# EAGLE board Full (EAGLE 9.6.2), part 1 of 2
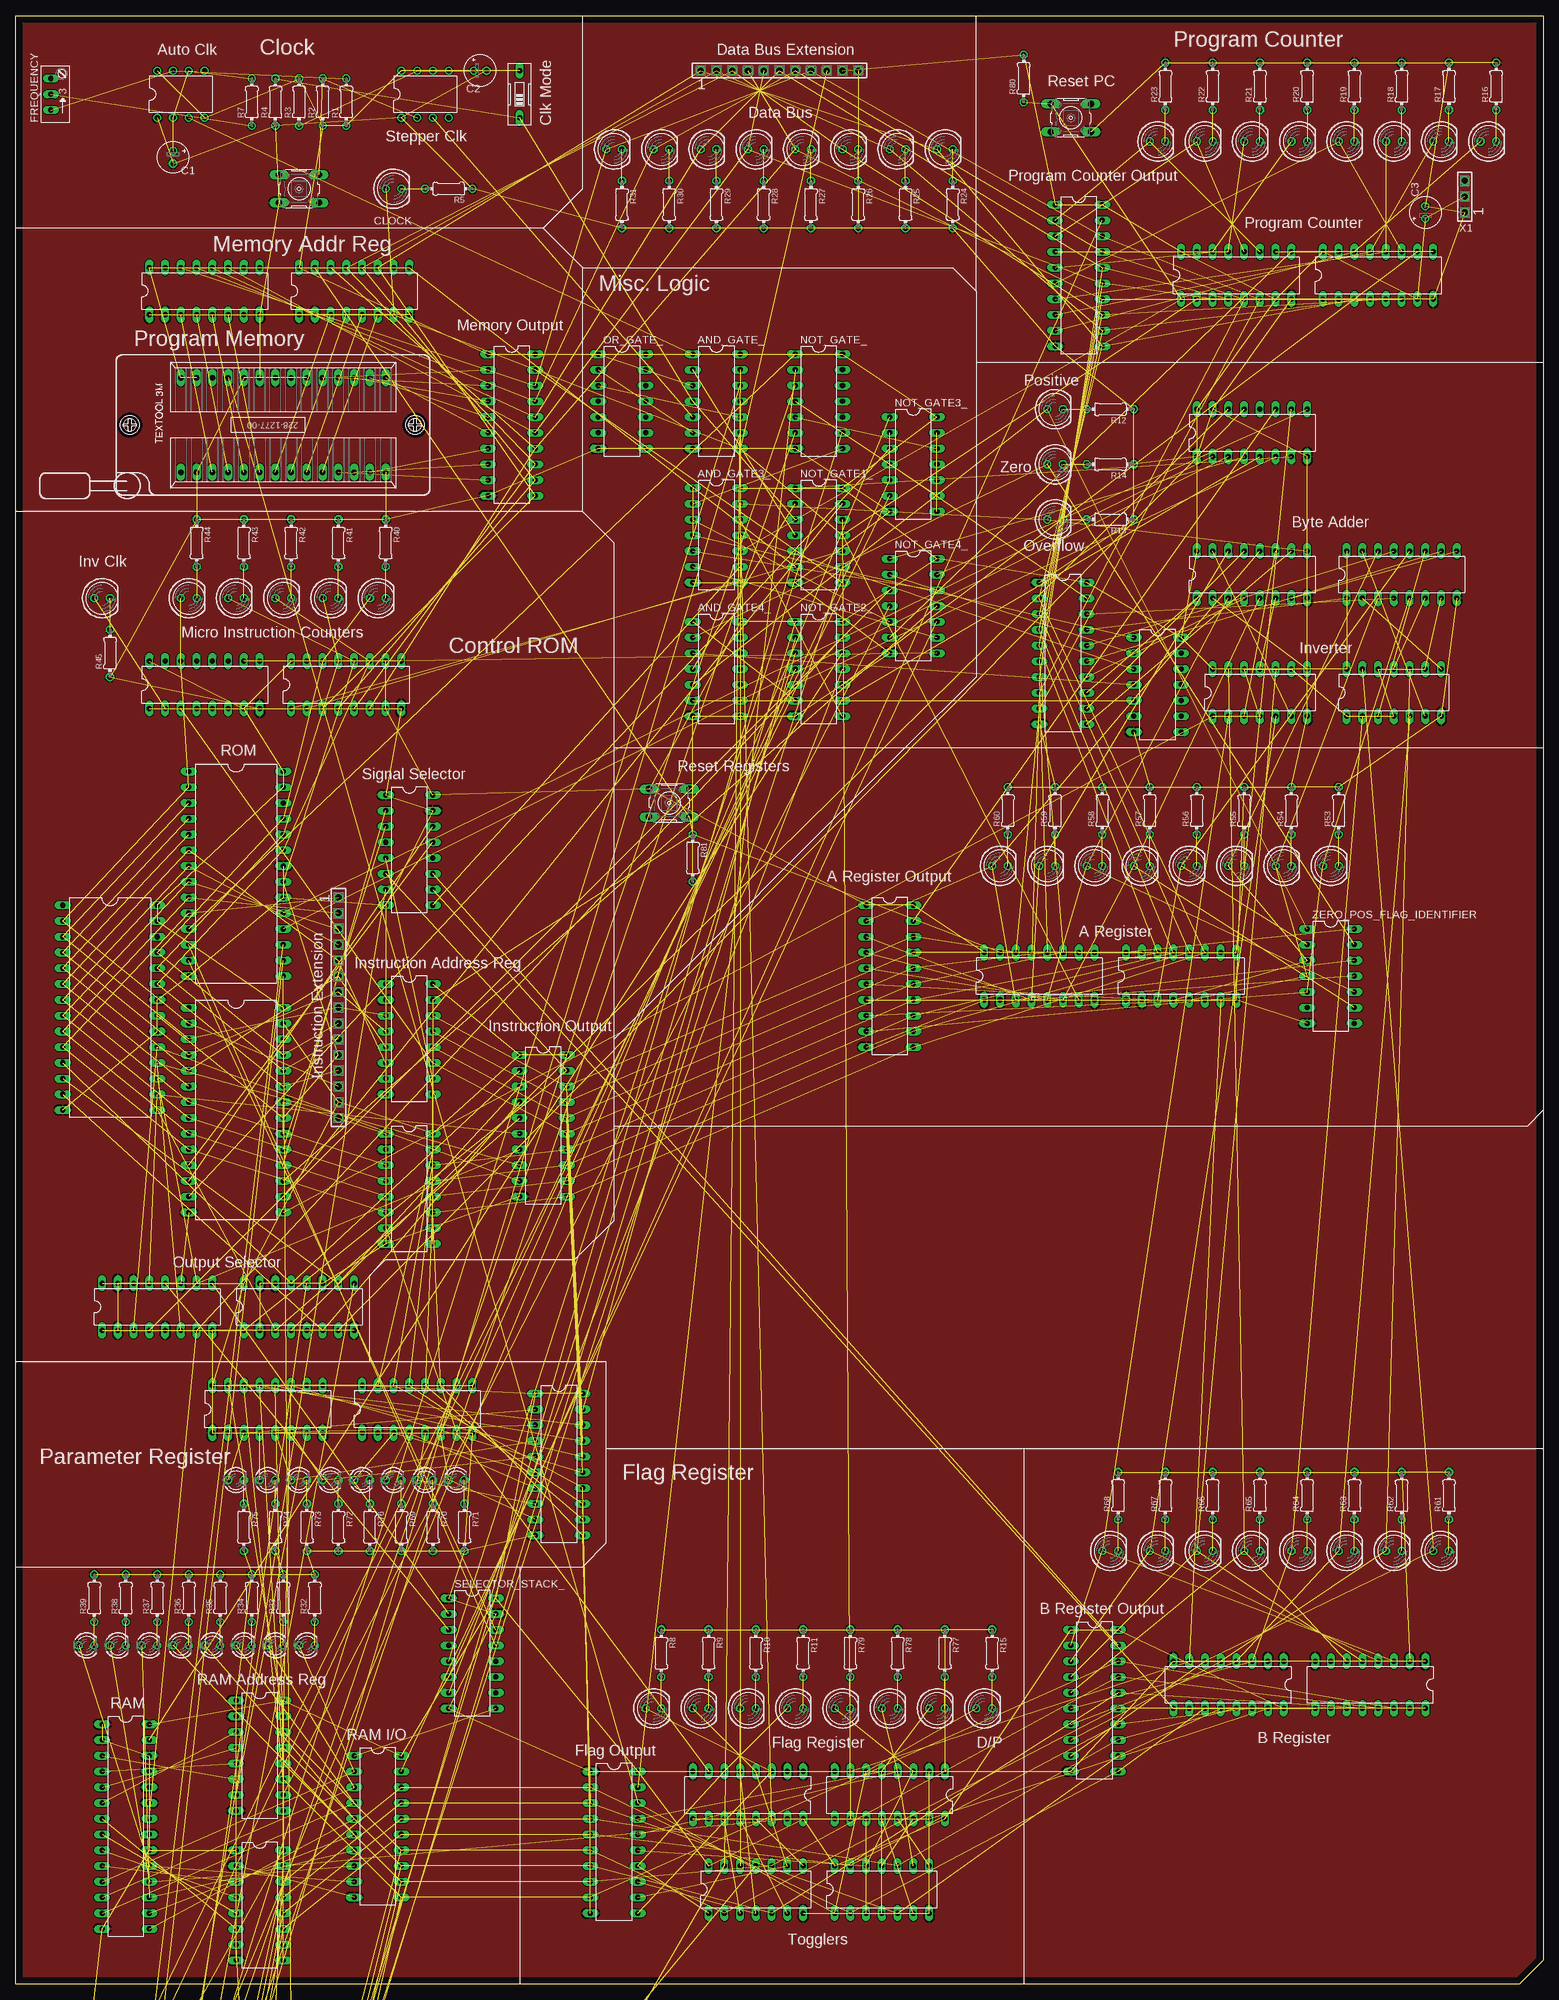
[diagram p0: board, top side]
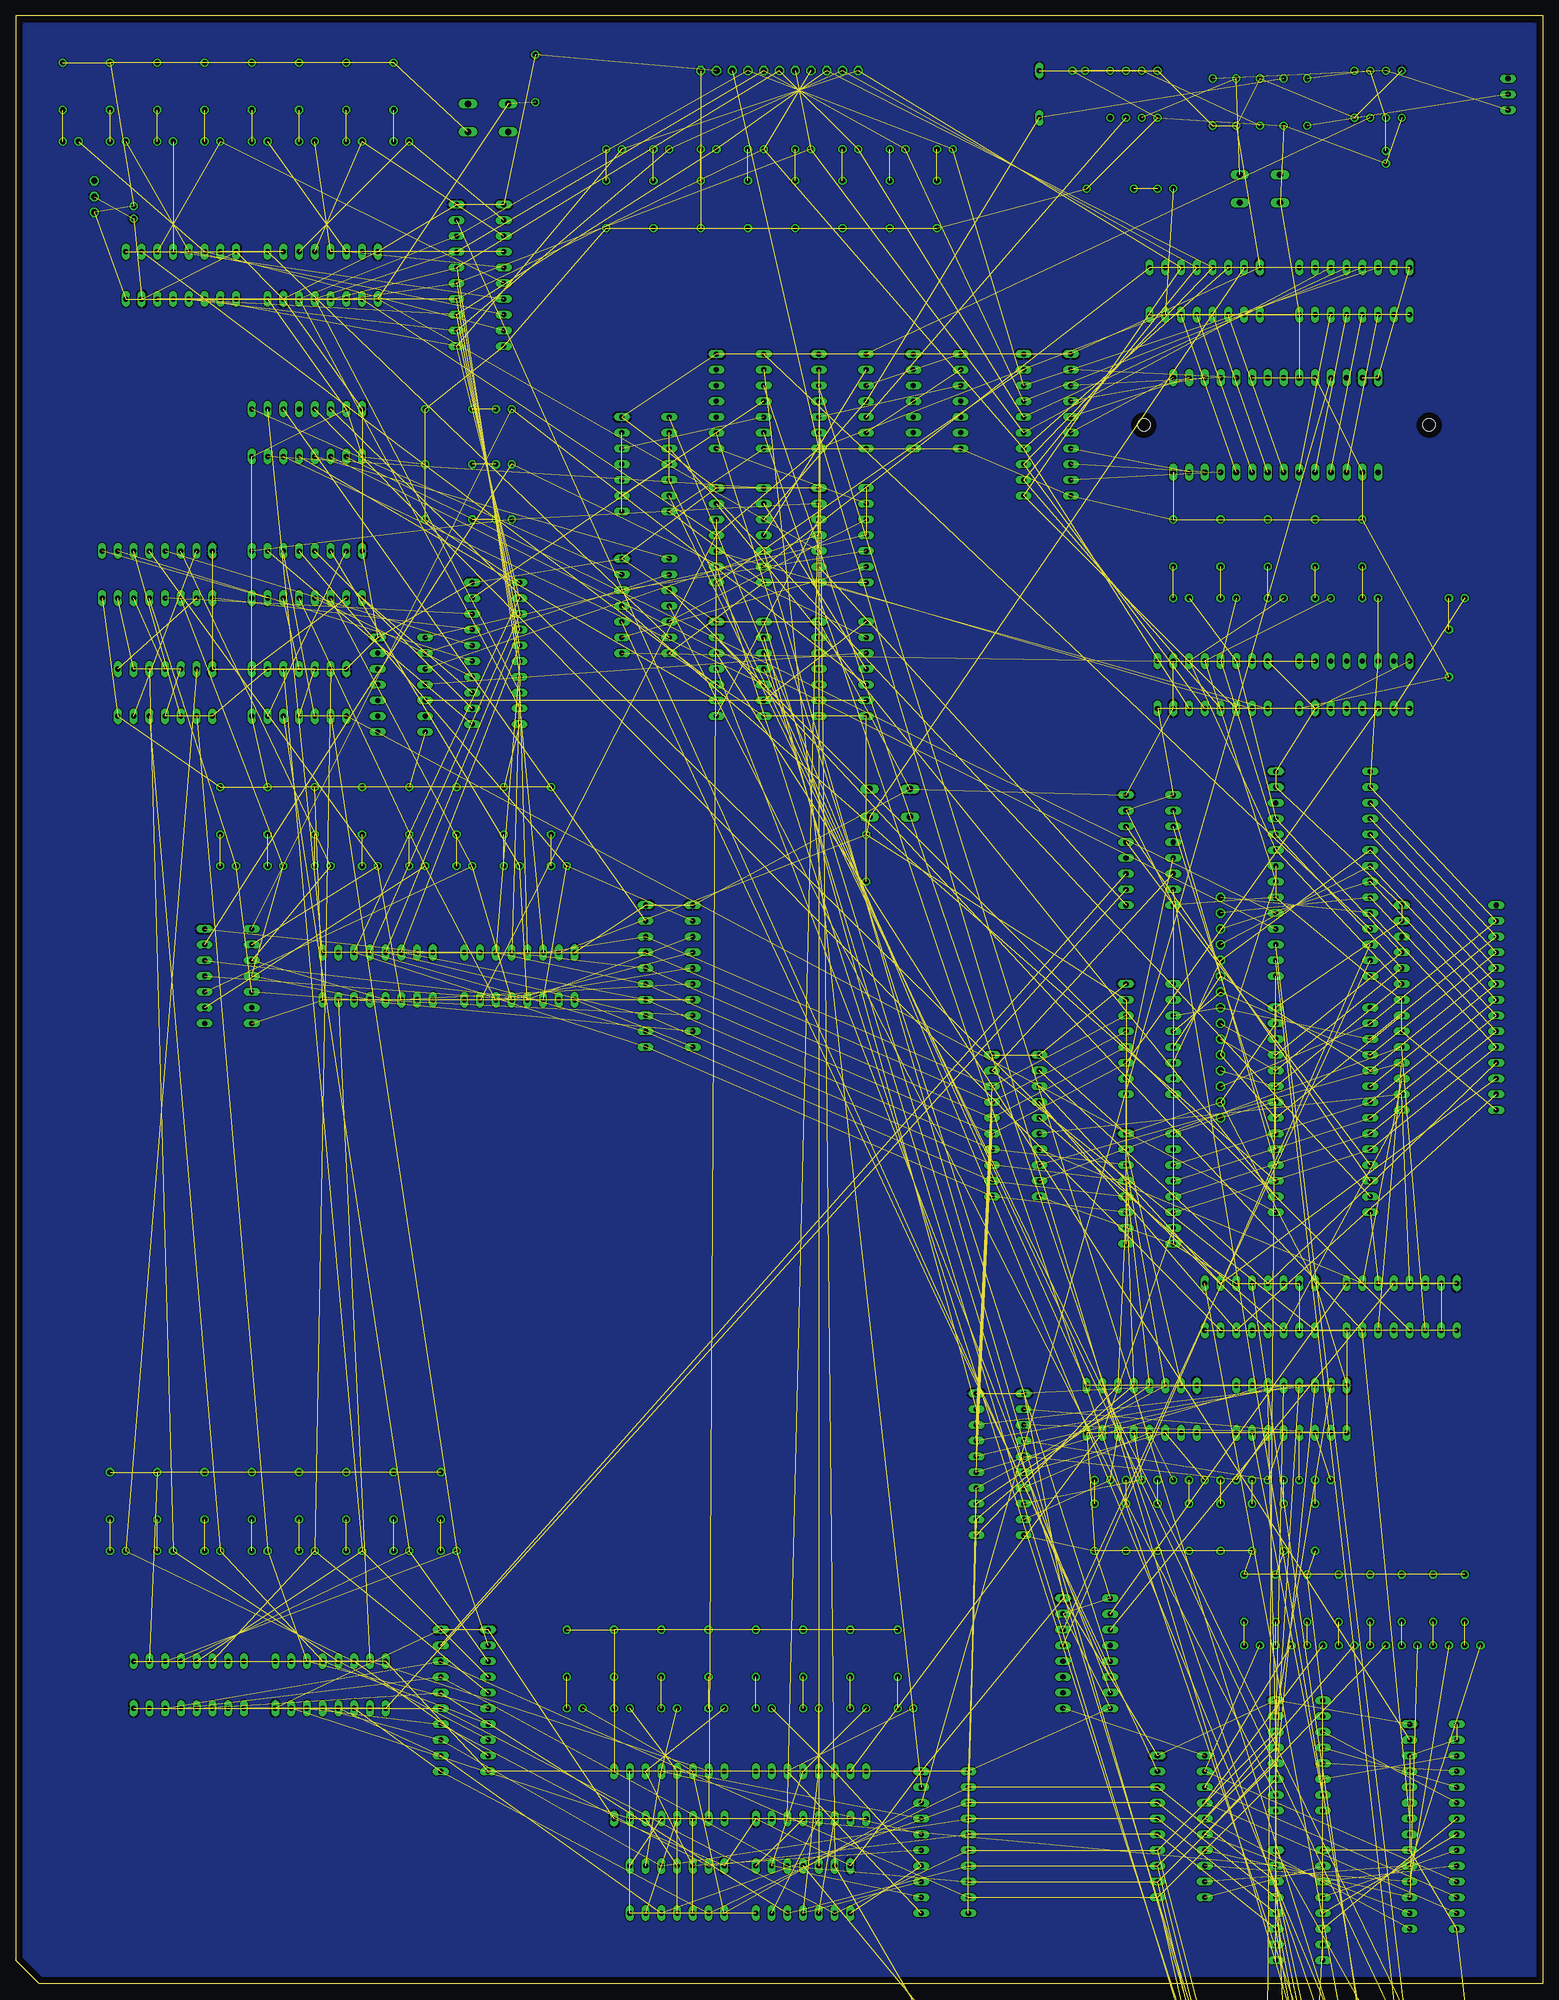
[diagram p1: board, bottom side, seen from below]

Size 246.38 x 317.5 mm. Coordinates in mm from the lower left corner, seen from the top.
Outline: 0,0 0,317.5 246.38,317.5 246.38,3.81 242.57,0 0,0
Copper layers (1*16): Top 0.035mm / dielectric 1.5mm / Bottom 0.035mm
Design rules "default": minimum track width 6mil, minimum drill 0.35mm, track to track 6mil, track to pad 6mil, pad to pad 6mil, via to via 6mil, smd to smd 6mil, copper to edge 40mil, drill to drill 6mil, minimum pad ring 10mil, minimum via ring 8mil, stop-mask expansion 4mil, vias tented up to drill 0mil, thermal gap 10mil

## Footprints (pad centres in the part's own frame; a part is rotated, then mirrored left to right if it is on the bottom)
DIL14 = drill 0.813 long: 1 -7.62,-3.81; 2 -5.08,-3.81; 3 -2.54,-3.81; 4 0,-3.81; 5 2.54,-3.81; 6 5.08,-3.81; 7 7.62,-3.81; 8 7.62,3.81; 9 5.08,3.81; 10 2.54,3.81; 11 0,3.81; 12 -2.54,3.81; 13 -5.08,3.81; 14 -7.62,3.81
DIL16 = drill 0.813 long: 1 -8.89,-3.81; 2 -6.35,-3.81; 3 -3.81,-3.81; 4 -1.27,-3.81; 5 1.27,-3.81; 6 3.81,-3.81; 7 6.35,-3.81; 8 8.89,-3.81; 9 8.89,3.81; 10 6.35,3.81; 11 3.81,3.81; 12 1.27,3.81; 13 -1.27,3.81; 14 -3.81,3.81; 15 -6.35,3.81; 16 -8.89,3.81
DIL08 = drill 0.813 pad 1.27: 1 -3.81,-3.81; 2 -1.27,-3.81; 3 1.27,-3.81; 4 3.81,-3.81; 5 3.81,3.81; 6 1.27,3.81; 7 -1.27,3.81; 8 -3.81,3.81
E2-5 = drill 0.813 pad 1.27: + -1.016,0 | drill 0.813 pad 1.27 octagon: - 1.016,0
EDG-01 = drill 0.813 long: 1 0,-3.81; 2 0,3.81
B3F-10XX = drill 1.016 long: 1 -3.251,2.261; 2 3.251,2.261; 3 -3.251,-2.261; 4 3.251,-2.261
LED5MM = drill 0.813 octagon: A -1.27,0; K 1.27,0
DO41Z10 = drill 1.118: A 5.08,0; C -5.08,0
SSW-111-02-G-S = drill 1 pad 1.5 octagon: 1 -12.7,0; 2 -10.16,0; 3 -7.62,0; 4 -5.08,0; 5 -2.54,0; 6 0,0; 7 2.54,0; 8 5.08,0; 9 7.62,0; 10 10.16,0; 11 12.7,0
RJ9W = drill 0.813 long: A 2.54,0.635; E -2.54,0.635; S 0,0.635
DIL28-6 = drill 0.813 long: 1 -16.51,-7.62; 2 -13.97,-7.62; 3 -11.43,-7.62; 4 -8.89,-7.62; 5 -6.35,-7.62; 6 -3.81,-7.62; 7 -1.27,-7.62; 8 1.27,-7.62; 9 3.81,-7.62; 10 6.35,-7.62; 11 8.89,-7.62; 12 11.43,-7.62; 13 13.97,-7.62; 14 16.51,-7.62; 15 16.51,7.62; 16 13.97,7.62; 17 11.43,7.62; 18 8.89,7.62; 19 6.35,7.62; 20 3.81,7.62; 21 1.27,7.62; 22 -1.27,7.62; 23 -3.81,7.62; 24 -6.35,7.62; 25 -8.89,7.62; 26 -11.43,7.62; 27 -13.97,7.62; 28 -16.51,7.62
SSW-115-02-G-S = drill 1 pad 1.5 octagon: 1 -17.78,0; 2 -15.24,0; 3 -12.7,0; 4 -10.16,0; 5 -7.62,0; 6 -5.08,0; 7 -2.54,0; 8 0,0; 9 2.54,0; 10 5.08,0; 11 7.62,0; 12 10.16,0; 13 12.7,0; 14 15.24,0; 15 17.78,0
SSW-104-02-G-S = drill 1 pad 1.5 octagon: 1 -3.81,0; 2 -1.27,0; 3 1.27,0; 4 3.81,0
228-1277-00-0602J = drill 0.9 long: 1 -16.51,-7.62; 2 -13.97,-7.62; 3 -11.43,-7.62; 4 -8.89,-7.62; 5 -6.35,-7.62; 6 -3.81,-7.62; 7 -1.27,-7.62; 8 1.27,-7.62; 9 3.81,-7.62; 10 6.35,-7.62; 11 8.89,-7.62; 12 11.43,-7.62; 13 13.97,-7.62; 14 16.51,-7.62; 15 16.51,7.62; 16 13.97,7.62; 17 11.43,7.62; 18 8.89,7.62; 19 6.35,7.62; 20 3.81,7.62; 21 1.27,7.62; 22 -1.27,7.62; 23 -3.81,7.62; 24 -6.35,7.62; 25 -8.89,7.62; 26 -11.43,7.62; 27 -13.97,7.62; 28 -16.51,7.62 | hole 2: 21.24,0; -24.74,0
7SEG-13 = drill 0.813 long: 1 -5.08,-7.62; 2 -2.54,-7.62; 3 0,-7.62; 4 2.54,-7.62; 5 5.08,-7.62; 6 5.08,7.62; 7 2.54,7.62; 8 0,7.62; 9 -2.54,7.62; 10 -5.08,7.62
DIL20 = drill 0.813 long: 1 -11.43,-3.81; 2 -8.89,-3.81; 3 -6.35,-3.81; 4 -3.81,-3.81; 5 -1.27,-3.81; 6 1.27,-3.81; 7 3.81,-3.81; 8 6.35,-3.81; 9 8.89,-3.81; 10 11.43,-3.81; 11 11.43,3.81; 12 8.89,3.81; 13 6.35,3.81; 14 3.81,3.81; 15 1.27,3.81; 16 -1.27,3.81; 17 -3.81,3.81; 18 -6.35,3.81; 19 -8.89,3.81; 20 -11.43,3.81
LED3MM = drill 0.813 octagon: A -1.27,0; K 1.27,0
0204/7 = drill 0.813 octagon: 1 -3.81,0; 2 3.81,0
DIL28-3 = drill 0.813 long: 1 -16.51,-3.81; 2 -13.97,-3.81; 3 -11.43,-3.81; 4 -8.89,-3.81; 5 -6.35,-3.81; 6 -3.81,-3.81; 7 -1.27,-3.81; 8 1.27,-3.81; 9 3.81,-3.81; 10 6.35,-3.81; 11 8.89,-3.81; 12 11.43,-3.81; 13 13.97,-3.81; 14 16.51,-3.81; 15 16.51,3.81; 16 13.97,3.81; 17 11.43,3.81; 18 8.89,3.81; 19 6.35,3.81; 20 3.81,3.81; 21 1.27,3.81; 22 -1.27,3.81; 23 -3.81,3.81; 24 -6.35,3.81; 25 -8.89,3.81; 26 -11.43,3.81; 27 -13.97,3.81; 28 -16.51,3.81
SSW-103-02-G-S = drill 1 pad 1.5 octagon: 1 -2.54,0; 2 0,0; 3 2.54,0

## Placement (x,y rotation side)
4_INP_OR_GATE  4072N  [DIL14]  184.15,209.55 270 top
ADDER_LOWER  74LS283N  [DIL16]  223.52,227.33 0 top
ADDER_UPPER  74LS283N  [DIL16]  199.39,227.33 0 top
ADDR_MEM_REG_LOWER  74LS173N  [DIL16]  54.61,273.05 0 top
ADDR_MEM_REG_UPPER  74LS173N  [DIL16]  30.48,273.05 0 top
AND_GATE3_  74LS08N  [DIL14]  113.03,233.68 270 top
AND_GATE4_  74LS08N  [DIL14]  113.03,212.09 270 top
AND_GATE_  74LS08N  [DIL14]  113.03,255.27 270 top
AUTO_CLOCK  NE555N  [DIL08]  26.67,304.8 0 top
C1  4.7uF  [E2-5]  25.4,294.64 270 top
C2  0.1uF  [E2-5]  74.93,308.61 0 top
C3  0.1uF  [E2-5]  227.33,285.75 90 top
C4  0.1uF  [E2-5]  2.54,-93.98 0 top  (outside the outline)
CLK_MODE  SWITCH  [EDG-01]  81.28,304.8 0 top
CLK_TRIGGER  SWITCH  [B3F-10XX]  45.72,289.56 0 top
CLOCK  Yellow  [LED5MM]  60.96,289.56 0 top
D1  1N4728  [DO41Z10]  5.08,-123.19 0 top  (outside the outline)
DATABUS_1  LED  [LED5MM]  149.86,295.91 0 top
DATABUS_2  LED  [LED5MM]  142.24,295.91 0 top
DATABUS_3  LED  [LED5MM]  134.62,295.91 0 top
DATABUS_4  LED  [LED5MM]  127,295.91 0 top
DATABUS_5  LED  [LED5MM]  119.38,295.91 0 top
DATABUS_6  LED  [LED5MM]  111.76,295.91 0 top
DATABUS_7  LED  [LED5MM]  104.14,295.91 0 top
DATABUS_8  LED  [LED5MM]  96.52,295.91 0 top
EXTENSION  SSW-111-02-G-S  [SSW-111-02-G-S]  123.19,308.61 0 top
FLAG_1  LED  [LED5MM]  156.21,44.45 0 top
FLAG_2  LED  [LED5MM]  148.59,44.45 0 top
FLAG_3  LED  [LED5MM]  140.97,44.45 0 top
FLAG_4  LED  [LED5MM]  133.35,44.45 0 top
FLAG_5  LED  [LED5MM]  125.73,44.45 0 top
FLAG_6  LED  [LED5MM]  118.11,44.45 0 top
FLAG_7  LED  [LED5MM]  110.49,44.45 0 top
FLAG_8  LED  [LED5MM]  102.87,44.45 0 top
FLAG_REG_LOWER  74LS173N  [DIL16]  118.11,30.48 180 top
FLAG_REG_UPPER  74LS173N  [DIL16]  140.97,30.48 180 top
FREQUENCY  100k  [RJ9W]  6.35,304.8 90 top
IC1  4161N  [DIL16]  -15.24,-303.53 0 top  (outside the outline)
INSTRUC_REGISTER_LOWER  74LS173N  [DIL16]  63.5,128.27 270 top
INSTRUC_REGISTER_UPPER  74LS173N  [DIL16]  63.5,152.4 270 top
INSTRUCTION_MEMORY_0  AT28C64B  [DIL28-6]  15.24,157.48 270 top
INSTRUCTION_MEMORY_1  AT28C64B  [DIL28-6]  35.56,140.97 270 top
INSTRUCTION_MEMORY_2  AT28C64B  [DIL28-6]  35.56,179.07 270 top
INSTRUCTIONS_EXTENSION  SSW-115-02-G-S  [SSW-115-02-G-S]  52.07,157.48 270 top
INVERTED_CLK_LED  LED  [LED5MM]  13.97,223.52 0 top
KEYBOARD  SSW-104-02-G-S  [SSW-104-02-G-S]  6.35,-69.85 0 top  (outside the outline)
KEYBOARD_ASCII_TABLE  AT28C64B  [DIL28-6]  19.05,-54.61 0 top  (outside the outline)
KEYBOARD_SHIFT_LOWER  74LS595N  [DIL16]  11.43,-39.37 0 top  (outside the outline)
KEYBOARD_SHIFT_UPPER  74LS595N  [DIL16]  11.43,-27.94 0 top  (outside the outline)
LED_A_REG_1  LED  [LED5MM]  212.09,180.34 0 top
LED_A_REG_2  LED  [LED5MM]  204.47,180.34 0 top
LED_A_REG_3  LED  [LED5MM]  196.85,180.34 0 top
LED_A_REG_4  LED  [LED5MM]  189.23,180.34 0 top
LED_A_REG_5  LED  [LED5MM]  181.61,180.34 0 top
LED_A_REG_6  LED  [LED5MM]  173.99,180.34 0 top
LED_A_REG_7  LED  [LED5MM]  166.37,180.34 0 top
LED_A_REG_8  LED  [LED5MM]  158.75,180.34 0 top
LED_B_REG_1  LED  [LED5MM]  229.87,69.85 0 top
LED_B_REG_2  LED  [LED5MM]  222.25,69.85 0 top
LED_B_REG_3  LED  [LED5MM]  214.63,69.85 0 top
LED_B_REG_4  LED  [LED5MM]  207.01,69.85 0 top
LED_B_REG_5  LED  [LED5MM]  199.39,69.85 0 top
LED_B_REG_6  LED  [LED5MM]  191.77,69.85 0 top
LED_B_REG_7  LED  [LED5MM]  184.15,69.85 0 top
LED_B_REG_8  LED  [LED5MM]  176.53,69.85 0 top
MEMORY  228-1277-00-0602J  [228-1277-00-0602J]  43.18,251.46 0 top
MICRO_COUNTER_LOWER  74LS161  [DIL16]  53.34,209.55 0 top
MICRO_COUNTER_UPPER  74LS161  [DIL16]  30.48,209.55 0 top
NOR_GATE_  74LS02N  [DIL14]  10.16,-102.87 0 top  (outside the outline)
NOT_GATE1_  74LS04N  [DIL14]  129.54,233.68 270 top
NOT_GATE2_  74LS04N  [DIL14]  129.54,212.09 270 top
NOT_GATE3_  74LS04N  [DIL14]  144.78,245.11 270 top
NOT_GATE4_  74LS04N  [DIL14]  144.78,222.25 270 top
NOT_GATE_  74LS04N  [DIL14]  129.54,255.27 270 top
OR_GATE_  74LS32N  [DIL14]  97.79,255.27 270 top
OUT_REG_LOWER  74LS173N  [DIL16]  39.37,-179.07 0 top  (outside the outline)
OUT_REG_UPPER  74LS173N  [DIL16]  11.43,-207.01 0 top  (outside the outline)
OUT_ROM_LOWER  AT28C64B  [DIL28-6]  -7.62,-276.86 0 top  (outside the outline)
OUT_ROM_UPPER  AT28C64B  [DIL28-6]  19.05,-240.03 0 top  (outside the outline)
OUT_SEGMENT_LOWER  LED  [7SEG-13]  -21.59,-237.49 0 top  (outside the outline)
OUT_SEGMENT_UPPER  LED  [7SEG-13]  -7.62,-237.49 0 top  (outside the outline)
OUTPUT_BUFFER_ALU  74LS245N  [DIL20]  168.91,214.63 270 top
OUTPUT_BUFFER_CALC_REG  74LS245N  [DIL20]  173.99,45.72 270 top
OUTPUT_BUFFER_FLAGS  74HC245N  [DIL20]  96.52,22.86 270 top
OUTPUT_BUFFER_INSTRUCTION  74LS245N  [DIL20]  85.09,138.43 270 top
OUTPUT_BUFFER_KEYBOARD  74LS245N  [DIL20]  13.97,-154.94 0 top  (outside the outline)
OUTPUT_BUFFER_MEMORY  74LS245N  [DIL20]  80.01,251.46 270 top
OUTPUT_BUFFER_PARAM_REG  74LS245N  [DIL20]  87.63,83.82 270 top
OUTPUT_BUFFER_PC  74LS245N  [DIL20]  171.45,275.59 270 top
OUTPUT_BUFFER_RAM  74HC245N  [DIL20]  58.42,25.4 270 top
OUTPUT_BUFFER_REG_A  74LS245N  [DIL20]  140.97,162.56 270 top
OVERFLOW_FLAG  LED  [LED5MM]  167.64,236.22 0 top
PARAM_LED_1  [LED3MM]  71.12,81.28 0 top
PARAM_LED_2  [LED3MM]  66.04,81.28 0 top
PARAM_LED_3  [LED3MM]  60.96,81.28 0 top
PARAM_LED_4  [LED3MM]  55.88,81.28 0 top
PARAM_LED_5  [LED3MM]  50.8,81.28 0 top
PARAM_LED_6  [LED3MM]  45.72,81.28 0 top
PARAM_LED_7  [LED3MM]  40.64,81.28 0 top
PARAM_LED_8  [LED3MM]  35.56,81.28 0 top
PC_1  [LED5MM]  237.49,297.18 0 top
PC_2  [LED5MM]  229.87,297.18 0 top
PC_3  [LED5MM]  222.25,297.18 0 top
PC_4  [LED5MM]  214.63,297.18 0 top
PC_5  [LED5MM]  207.01,297.18 0 top
PC_6  [LED5MM]  199.39,297.18 0 top
PC_7  [LED5MM]  191.77,297.18 0 top
PC_8  [LED5MM]  184.15,297.18 0 top
POSITIVE_FLAG  LED  [LED5MM]  167.64,254 0 top
PROGRAM_COUNTER_LOWER  74LS161  [DIL16]  219.71,275.59 0 top
PROGRAM_COUNTER_UPPER  74LS161  [DIL16]  196.85,275.59 0 top
R1  1k  [0204/7]  53.34,303.53 90 top
R2  1k  [0204/7]  49.53,303.53 90 top
R3  10k  [0204/7]  45.72,303.53 90 top
R4  220  [0204/7]  41.91,303.53 90 top
R5  ~220  [0204/7]  69.85,289.56 180 top
R6  ~220  [0204/7]  3.81,-88.9 0 top  (outside the outline)
R7  220  [0204/7]  38.1,303.53 90 top
R8  ~220  [0204/7]  104.14,53.34 270 top
R9  ~220  [0204/7]  111.76,53.34 270 top
R10  ~220  [0204/7]  119.38,53.34 270 top
R11  ~220  [0204/7]  127,53.34 270 top
R12  ~220  [0204/7]  176.53,254 180 top
R13  ~220  [0204/7]  176.53,236.22 180 top
R14  ~220  [0204/7]  176.53,245.11 180 top
R15  ~220  [0204/7]  157.48,53.34 270 top
R16  ~220  [0204/7]  238.76,306.07 90 top
R17  ~220  [0204/7]  231.14,306.07 90 top
R18  ~220  [0204/7]  223.52,306.07 90 top
R19  ~220  [0204/7]  215.9,306.07 90 top
R20  ~220  [0204/7]  208.28,306.07 90 top
R21  ~220  [0204/7]  200.66,306.07 90 top
R22  ~220  [0204/7]  193.04,306.07 90 top
R23  ~220  [0204/7]  185.42,306.07 90 top
R24  ~220  [0204/7]  151.13,287.02 270 top
R25  ~220  [0204/7]  143.51,287.02 270 top
R26  ~220  [0204/7]  135.89,287.02 270 top
R27  ~220  [0204/7]  128.27,287.02 270 top
R28  ~220  [0204/7]  120.65,287.02 270 top
R29  ~220  [0204/7]  113.03,287.02 270 top
R30  ~220  [0204/7]  105.41,287.02 270 top
R31  ~220  [0204/7]  97.79,287.02 270 top
R32  ~220  [0204/7]  48.26,62.23 90 top
R33  ~220  [0204/7]  43.18,62.23 90 top
R34  ~220  [0204/7]  38.1,62.23 90 top
R35  ~220  [0204/7]  33.02,62.23 90 top
R36  ~220  [0204/7]  27.94,62.23 90 top
R37  ~220  [0204/7]  22.86,62.23 90 top
R38  ~220  [0204/7]  17.78,62.23 90 top
R39  ~220  [0204/7]  12.7,62.23 90 top
R40  ~220  [0204/7]  59.69,232.41 270 top
R41  ~220  [0204/7]  52.07,232.41 270 top
R42  ~220  [0204/7]  44.45,232.41 270 top
R43  ~220  [0204/7]  36.83,232.41 270 top
R44  ~220  [0204/7]  29.21,232.41 270 top
R45  ~220  [0204/7]  15.24,214.63 90 top
R53  ~220  [0204/7]  213.36,189.23 90 top
R54  ~220  [0204/7]  205.74,189.23 90 top
R55  ~220  [0204/7]  198.12,189.23 90 top
R56  ~220  [0204/7]  190.5,189.23 90 top
R57  ~220  [0204/7]  182.88,189.23 90 top
R58  ~220  [0204/7]  175.26,189.23 90 top
R59  ~220  [0204/7]  167.64,189.23 90 top
R60  ~220  [0204/7]  160.02,189.23 90 top
R61  ~220  [0204/7]  231.14,78.74 90 top
R62  ~220  [0204/7]  223.52,78.74 90 top
R63  ~220  [0204/7]  215.9,78.74 90 top
R64  ~220  [0204/7]  208.28,78.74 90 top
R65  ~220  [0204/7]  200.66,78.74 90 top
R66  ~220  [0204/7]  193.04,78.74 90 top
R67  ~220  [0204/7]  185.42,78.74 90 top
R68  ~220  [0204/7]  177.8,78.74 90 top
R69  ~220  [0204/7]  62.23,73.66 270 top
R70  ~220  [0204/7]  67.31,73.66 270 top
R71  ~220  [0204/7]  72.39,73.66 270 top
R72  ~220  [0204/7]  52.07,73.66 270 top
R73  ~220  [0204/7]  46.99,73.66 270 top
R74  ~220  [0204/7]  41.91,73.66 270 top
R75  ~220  [0204/7]  36.83,73.66 270 top
R76  ~220  [0204/7]  57.15,73.66 270 top
R77  ~220  [0204/7]  149.86,53.34 270 top
R78  ~220  [0204/7]  142.24,53.34 270 top
R79  ~220  [0204/7]  134.62,53.34 270 top
R80  ~220  [0204/7]  162.56,307.34 90 top
R81  ~220  [0204/7]  109.22,181.61 270 top
RAM  71256SA15TPG  [DIL28-3]  17.78,25.4 270 top
RAM1  71256SA15TPG  [DIL28-3]  -7.62,-292.1 0 top  (outside the outline)
RAM_ADDR_LOWER  74LS173N  [DIL16]  39.37,12.7 270 top
RAM_ADDR_UPPER  74LS173N  [DIL16]  39.37,36.83 270 top
RAM_LED_1  [LED3MM]  46.99,54.61 0 top
RAM_LED_2  [LED3MM]  41.91,54.61 0 top
RAM_LED_3  [LED3MM]  36.83,54.61 0 top
RAM_LED_4  [LED3MM]  31.75,54.61 0 top
RAM_LED_5  [LED3MM]  26.67,54.61 0 top
RAM_LED_6  [LED3MM]  21.59,54.61 0 top
RAM_LED_7  [LED3MM]  16.51,54.61 0 top
RAM_LED_8  [LED3MM]  11.43,54.61 0 top
REG_A_LOWER  74LS173N  [DIL16]  187.96,162.56 0 top
REG_A_UPPER  74LS173N  [DIL16]  165.1,162.56 0 top
REG_CALC_LOWER  74LS173N  [DIL16]  195.58,48.26 180 top
REG_CALC_UPPER  74LS173N  [DIL16]  218.44,48.26 180 top
REG_PARAM_LOWER  74LS173N  [DIL16]  64.77,92.71 0 top
REG_PARAM_UPPER  74LS173N  [DIL16]  40.64,92.71 0 top
RESET_PC  NORM-OFF  [B3F-10XX]  170.18,300.99 0 top
RESET_REGS  NORM-OFF  [B3F-10XX]  105.41,190.5 0 top
SELECTOR_BRANCH_  74HC139N  [DIL16]  199.39,250.19 0 top
SELECTOR_INSRUCTION_LOWER  74LS157N  [DIL16]  45.72,109.22 0 top
SELECTOR_INSRUCTION_UPPER  74LS157N  [DIL16]  22.86,109.22 0 top
SELECTOR_LOGIC_  74HC139N  [DIL16]  63.5,182.88 270 top
SELECTOR_PARAM_  74LS139N  [DIL16]  11.43,-143.51 0 top  (outside the outline)
SELECTOR_STACK_  74LS139N  [DIL16]  73.66,53.34 270 top
STEPPER_CLOCK  NE555N  [DIL08]  66.04,304.8 0 top
SUBTRACT_INVRTR_LOWER_  74LS86N  [DIL14]  222.25,208.28 0 top
SUBTRACT_INVRTR_UPPER_  74LS86N  [DIL14]  200.66,208.28 0 top
USTEP_1  LED  [LED5MM]  58.42,223.52 0 top
USTEP_2  LED  [LED5MM]  50.8,223.52 0 top
USTEP_3  LED  [LED5MM]  43.18,223.52 0 top
USTEP_4  LED  [LED5MM]  35.56,223.52 0 top
USTEP_5  LED  [LED5MM]  27.94,223.52 0 top
X1  SSW-103-02-G-S  [SSW-103-02-G-S]  233.68,288.29 90 top
XOR_GATE_1  74LS86N  [DIL14]  139.7,15.24 0 top
XOR_GATE_2  74LS86N  [DIL14]  119.38,15.24 0 top
ZERO_FLAG  220  [LED5MM]  167.64,245.11 0 top
ZERO_POS_FLAG_IDENTIFIER  744078N  [DIL14]  212.09,162.56 270 top

## Library data of the parts
4_INP_OR_GATE IC1 = 40xx
ADDER_LOWER ADDER_UPPER ADDR_MEM_REG_LOWER ADDR_MEM_REG_UPPER AND_GATE3_ AND_GATE4_ AND_GATE_ FLAG_REG_LOWER FLAG_REG_UPPER INSTRUC_REGISTER_LOWER INSTRUC_REGISTER_UPPER KEYBOARD_SHIFT_LOWER KEYBOARD_SHIFT_UPPER NOR_GATE_ NOT_GATE1_ NOT_GATE2_ NOT_GATE3_ NOT_GATE_ OR_GATE_ OUT_REG_LOWER OUT_REG_UPPER OUTPUT_BUFFER_ALU OUTPUT_BUFFER_CALC_REG OUTPUT_BUFFER_FLAGS OUTPUT_BUFFER_KEYBOARD OUTPUT_BUFFER_MEMORY OUTPUT_BUFFER_PARAM_REG OUTPUT_BUFFER_PC OUTPUT_BUFFER_RAM OUTPUT_BUFFER_REG_A RAM_ADDR_LOWER RAM_ADDR_UPPER REG_A_LOWER REG_A_UPPER REG_CALC_LOWER REG_CALC_UPPER REG_PARAM_LOWER REG_PARAM_UPPER SELECTOR_BRANCH_ SELECTOR_INSRUCTION_LOWER SELECTOR_INSRUCTION_UPPER SELECTOR_LOGIC_ SELECTOR_PARAM_ SELECTOR_STACK_ SUBTRACT_INVRTR_LOWER_ SUBTRACT_INVRTR_UPPER_ XOR_GATE_1 XOR_GATE_2 = 74xx-eu
AUTO_CLOCK STEPPER_CLOCK = linear
C1-C4 = rcl; SPICEPREFIX: C
CLK_MODE OUT_SEGMENT_LOWER OUT_SEGMENT_UPPER = special
CLK_TRIGGER RESET_PC RESET_REGS = switch-omron; MPN: B3F-1000; OC_FARNELL: 176432; OC_NEWARK: 36M3542
CLOCK DATABUS_1-DATABUS_8 FLAG_1-FLAG_8 INVERTED_CLK_LED LED_A_REG_1-LED_A_REG_8 LED_B_REG_1-LED_B_REG_8 OVERFLOW_FLAG PARAM_LED_1-PARAM_LED_8 PC_1-PC_8 POSITIVE_FLAG RAM_LED_1-RAM_LED_8 USTEP_1-USTEP_5 ZERO_FLAG = led
D1 = diode
EXTENSION = con-samtec; MF: Samtec Inc.; MPN: SSW-111-02-G-S; OC_FARNELL: unknown; OC_NEWARK: 11P9498
FREQUENCY = pot
INSTRUCTION_MEMORY_0 INSTRUCTION_MEMORY_1 INSTRUCTION_MEMORY_2 KEYBOARD_ASCII_TABLE MICRO_COUNTER_LOWER MICRO_COUNTER_UPPER OUT_ROM_LOWER OUT_ROM_UPPER PROGRAM_COUNTER_LOWER PROGRAM_COUNTER_UPPER RAM RAM1 = ic-package
INSTRUCTIONS_EXTENSION = con-samtec; MF: Samtec Inc.; MPN: SSW-115-02-G-S; OC_FARNELL: unknown; OC_NEWARK: 11P9564
KEYBOARD = con-samtec; MF: Samtec Inc.; MPN: SSW-104-02-G-S; OC_FARNELL: unknown; OC_NEWARK: 11P9384
MEMORY = con-3m; MF: 3M; MPN: 228-1277-00-0602J; OC_FARNELL: 9897356; OC_NEWARK: 85K7825
NOT_GATE4_ = 74xx-eu; SPICEPREFIX: B
OUTPUT_BUFFER_INSTRUCTION = 74xx-us
R1-R45 R53-R81 = rcl; SPICEPREFIX: R
X1 = con-samtec; MF: Samtec Inc.; MPN: SSW-103-02-G-S; OC_FARNELL: unknown; OC_NEWARK: 11P9367
ZERO_POS_FLAG_IDENTIFIER = 74ttl-din

## Nets
1_PLACE1 [Databus]: ADDR_MEM_REG_LOWER.11 DATABUS_1.A EXTENSION.1 INSTRUC_REGISTER_LOWER.11 MICRO_COUNTER_LOWER.3 OUT_REG_LOWER.11 OUTPUT_BUFFER_ALU.2 OUTPUT_BUFFER_CALC_REG.11 OUTPUT_BUFFER_FLAGS.2 OUTPUT_BUFFER_INSTRUCTION.11 OUTPUT_BUFFER_KEYBOARD.2 OUTPUT_BUFFER_MEMORY.11 OUTPUT_BUFFER_PARAM_REG.11 OUTPUT_BUFFER_PC.11 OUTPUT_BUFFER_RAM.18 OUTPUT_BUFFER_REG_A.11 PROGRAM_COUNTER_LOWER.3 RAM_ADDR_LOWER.14 REG_A_LOWER.11 REG_CALC_LOWER.11 REG_PARAM_LOWER.11 XOR_GATE_1.2
2_PLACE [Databus]: ADDR_MEM_REG_LOWER.12 DATABUS_2.A EXTENSION.2 INSTRUC_REGISTER_LOWER.12 MICRO_COUNTER_LOWER.4 OUT_REG_LOWER.12 OUTPUT_BUFFER_ALU.3 OUTPUT_BUFFER_CALC_REG.12 OUTPUT_BUFFER_FLAGS.3 OUTPUT_BUFFER_INSTRUCTION.12 OUTPUT_BUFFER_KEYBOARD.3 OUTPUT_BUFFER_MEMORY.12 OUTPUT_BUFFER_PARAM_REG.12 OUTPUT_BUFFER_PC.12 OUTPUT_BUFFER_RAM.17 OUTPUT_BUFFER_REG_A.12 PROGRAM_COUNTER_LOWER.4 RAM_ADDR_LOWER.13 REG_A_LOWER.12 REG_CALC_LOWER.12 REG_PARAM_LOWER.12 XOR_GATE_1.5
4_PLACE [Databus]: ADDR_MEM_REG_LOWER.13 DATABUS_3.A EXTENSION.3 INSTRUC_REGISTER_LOWER.13 MICRO_COUNTER_LOWER.5 OUT_REG_LOWER.13 OUTPUT_BUFFER_ALU.4 OUTPUT_BUFFER_CALC_REG.13 OUTPUT_BUFFER_FLAGS.4 OUTPUT_BUFFER_INSTRUCTION.13 OUTPUT_BUFFER_KEYBOARD.4 OUTPUT_BUFFER_MEMORY.13 OUTPUT_BUFFER_PARAM_REG.13 OUTPUT_BUFFER_PC.13 OUTPUT_BUFFER_RAM.16 OUTPUT_BUFFER_REG_A.13 PROGRAM_COUNTER_LOWER.5 RAM_ADDR_LOWER.12 REG_A_LOWER.13 REG_CALC_LOWER.13 REG_PARAM_LOWER.13 XOR_GATE_1.10
8_PLACE [Databus]: ADDR_MEM_REG_LOWER.14 DATABUS_4.A EXTENSION.4 INSTRUC_REGISTER_LOWER.14 MICRO_COUNTER_LOWER.6 OUT_REG_LOWER.14 OUTPUT_BUFFER_ALU.5 OUTPUT_BUFFER_CALC_REG.14 OUTPUT_BUFFER_FLAGS.5 OUTPUT_BUFFER_INSTRUCTION.14 OUTPUT_BUFFER_KEYBOARD.5 OUTPUT_BUFFER_MEMORY.14 OUTPUT_BUFFER_PARAM_REG.14 OUTPUT_BUFFER_PC.14 OUTPUT_BUFFER_RAM.15 OUTPUT_BUFFER_REG_A.14 PROGRAM_COUNTER_LOWER.6 RAM_ADDR_LOWER.11 REG_A_LOWER.14 REG_CALC_LOWER.14 REG_PARAM_LOWER.14 XOR_GATE_1.13
16_PLACE [Databus]: ADDR_MEM_REG_UPPER.11 DATABUS_5.A EXTENSION.5 INSTRUC_REGISTER_UPPER.11 MICRO_COUNTER_UPPER.3 OUT_REG_UPPER.11 OUTPUT_BUFFER_ALU.6 OUTPUT_BUFFER_CALC_REG.15 OUTPUT_BUFFER_FLAGS.6 OUTPUT_BUFFER_INSTRUCTION.15 OUTPUT_BUFFER_KEYBOARD.6 OUTPUT_BUFFER_MEMORY.15 OUTPUT_BUFFER_PARAM_REG.15 OUTPUT_BUFFER_PC.15 OUTPUT_BUFFER_RAM.14 OUTPUT_BUFFER_REG_A.15 PROGRAM_COUNTER_UPPER.3 RAM_ADDR_UPPER.14 REG_A_UPPER.11 REG_CALC_UPPER.11 REG_PARAM_UPPER.11 XOR_GATE_2.2
32_PLACE [Databus]: ADDR_MEM_REG_UPPER.12 DATABUS_6.A EXTENSION.6 INSTRUC_REGISTER_UPPER.12 OUT_REG_UPPER.12 OUTPUT_BUFFER_ALU.7 OUTPUT_BUFFER_CALC_REG.16 OUTPUT_BUFFER_FLAGS.7 OUTPUT_BUFFER_INSTRUCTION.16 OUTPUT_BUFFER_KEYBOARD.7 OUTPUT_BUFFER_MEMORY.16 OUTPUT_BUFFER_PARAM_REG.16 OUTPUT_BUFFER_PC.16 OUTPUT_BUFFER_RAM.13 OUTPUT_BUFFER_REG_A.16 PROGRAM_COUNTER_UPPER.4 RAM_ADDR_UPPER.13 REG_A_UPPER.12 REG_CALC_UPPER.12 REG_PARAM_UPPER.12 XOR_GATE_2.5
64_PLACE [Databus]: ADDR_MEM_REG_UPPER.13 DATABUS_7.A EXTENSION.7 INSTRUC_REGISTER_UPPER.13 OUT_REG_UPPER.13 OUTPUT_BUFFER_ALU.8 OUTPUT_BUFFER_CALC_REG.17 OUTPUT_BUFFER_FLAGS.8 OUTPUT_BUFFER_INSTRUCTION.17 OUTPUT_BUFFER_KEYBOARD.8 OUTPUT_BUFFER_MEMORY.17 OUTPUT_BUFFER_PARAM_REG.17 OUTPUT_BUFFER_PC.17 OUTPUT_BUFFER_RAM.12 OUTPUT_BUFFER_REG_A.17 PROGRAM_COUNTER_UPPER.5 RAM_ADDR_UPPER.12 REG_A_UPPER.13 REG_CALC_UPPER.13 REG_PARAM_UPPER.13 XOR_GATE_2.10
128_PLACE [Databus]: ADDR_MEM_REG_UPPER.14 DATABUS_8.A EXTENSION.8 INSTRUC_REGISTER_UPPER.14 OUT_REG_UPPER.14 OUTPUT_BUFFER_ALU.9 OUTPUT_BUFFER_CALC_REG.18 OUTPUT_BUFFER_FLAGS.9 OUTPUT_BUFFER_INSTRUCTION.18 OUTPUT_BUFFER_KEYBOARD.9 OUTPUT_BUFFER_MEMORY.18 OUTPUT_BUFFER_PARAM_REG.18 OUTPUT_BUFFER_PC.18 OUTPUT_BUFFER_RAM.11 OUTPUT_BUFFER_REG_A.18 PROGRAM_COUNTER_UPPER.6 RAM_ADDR_UPPER.11 REG_A_UPPER.14 REG_CALC_UPPER.14 REG_PARAM_UPPER.14
>0_FLAG: AND_GATE4_.5 POSITIVE_FLAG.A ZERO_POS_FLAG_IDENTIFIER.1
CALC_IN: REG_CALC_LOWER.9 REG_CALC_LOWER.10 REG_CALC_UPPER.9 REG_CALC_UPPER.10 SELECTOR_LOGIC_.10
CALC_OUT: OUTPUT_BUFFER_CALC_REG.19 SELECTOR_LOGIC_.11
CLOCK: ADDR_MEM_REG_LOWER.7 ADDR_MEM_REG_UPPER.7 AND_GATE_.8 CLOCK.A EXTENSION.9 FLAG_REG_LOWER.7 FLAG_REG_UPPER.7 INSTRUC_REGISTER_LOWER.7 INSTRUC_REGISTER_UPPER.7 NOT_GATE1_.11 OUT_REG_LOWER.7 OUT_REG_UPPER.7 PROGRAM_COUNTER_LOWER.2 PROGRAM_COUNTER_UPPER.2 RAM_ADDR_LOWER.7 RAM_ADDR_UPPER.7 REG_A_LOWER.7 REG_A_UPPER.7 REG_CALC_LOWER.7 REG_CALC_UPPER.7 REG_PARAM_LOWER.7 REG_PARAM_UPPER.7
CLR_REG: ADDR_MEM_REG_LOWER.15 ADDR_MEM_REG_UPPER.15 FLAG_REG_LOWER.15 FLAG_REG_UPPER.15 INSTRUC_REGISTER_LOWER.15 INSTRUC_REGISTER_UPPER.15 OUT_REG_LOWER.15 OUT_REG_UPPER.15 R81.1 RAM_ADDR_LOWER.15 RAM_ADDR_UPPER.15 REG_A_LOWER.15 REG_A_UPPER.15 REG_CALC_LOWER.15 REG_CALC_UPPER.15 REG_PARAM_LOWER.15 REG_PARAM_UPPER.15 RESET_REGS.4
COUNTERS_CLEAR: AND_GATE3_.10 PROGRAM_COUNTER_LOWER.1 PROGRAM_COUNTER_UPPER.1 R80.1 RESET_PC.1
CTRL_SIG_1: INSTRUCTION_MEMORY_0.11 OUTPUT_BUFFER_INSTRUCTION.2 SELECTOR_INSRUCTION_LOWER.13
CTRL_SIG_2: INSTRUCTION_MEMORY_0.12 OUTPUT_BUFFER_INSTRUCTION.3 SELECTOR_INSRUCTION_LOWER.10
CTRL_SIG_3: INSTRUCTION_MEMORY_0.13 OUTPUT_BUFFER_INSTRUCTION.4 SELECTOR_INSRUCTION_LOWER.6
CTRL_SIG_4: INSTRUCTION_MEMORY_0.15 OUTPUT_BUFFER_INSTRUCTION.5 SELECTOR_INSRUCTION_LOWER.3
CTRL_SIG_5: INSTRUCTION_MEMORY_0.16 OUTPUT_BUFFER_INSTRUCTION.6 SELECTOR_INSRUCTION_UPPER.13
CTRL_SIG_6: INSTRUCTION_MEMORY_0.17 OUTPUT_BUFFER_INSTRUCTION.7 SELECTOR_INSRUCTION_UPPER.10
CTRL_SIG_7: INSTRUCTION_MEMORY_0.18 OUTPUT_BUFFER_INSTRUCTION.8 SELECTOR_INSRUCTION_UPPER.6
CTRL_SIG_8: INSTRUCTION_MEMORY_0.19 OUTPUT_BUFFER_INSTRUCTION.9 SELECTOR_INSRUCTION_UPPER.3
CTRL_SIG_9: INSTRUCTION_MEMORY_1.11 SELECTOR_LOGIC_.13
CTRL_SIG_10: INSTRUCTION_MEMORY_1.12 SELECTOR_LOGIC_.14
CTRL_SIG_11: INSTRUCTION_MEMORY_1.13 NOT_GATE3_.3
CTRL_SIG_12: ADDER_LOWER.7 INSTRUCTION_MEMORY_1.15 SUBTRACT_INVRTR_LOWER_.1 SUBTRACT_INVRTR_LOWER_.4 SUBTRACT_INVRTR_LOWER_.9 SUBTRACT_INVRTR_LOWER_.12 SUBTRACT_INVRTR_UPPER_.1 SUBTRACT_INVRTR_UPPER_.4 SUBTRACT_INVRTR_UPPER_.9 SUBTRACT_INVRTR_UPPER_.12
CTRL_SIG_13: INSTRUCTION_MEMORY_1.16 NOT_GATE1_.13
CTRL_SIG_14: INSTRUCTION_MEMORY_1.17 NOT_GATE4_.11
CTRL_SIG_15: INSTRUCTION_MEMORY_1.18 SELECTOR_LOGIC_.2
CTRL_SIG_16: INSTRUCTION_MEMORY_1.19 SELECTOR_LOGIC_.3
CTRL_SIG_17_(FLAG_OUT): INSTRUCTION_MEMORY_2.11 NOT_GATE_.1
CTRL_SIG_18_(STACK_PUSH): INSTRUCTION_MEMORY_2.12 SELECTOR_STACK_.13
CTRL_SIG_19_(STACK_POP): INSTRUCTION_MEMORY_2.13 SELECTOR_STACK_.14
CTRL_SIG_20_(OUT_REG): INSTRUCTION_MEMORY_2.15 OUT_REG_LOWER.9 OUT_REG_LOWER.10 OUT_REG_UPPER.9 OUT_REG_UPPER.10
CTRL_SIG_21_(P_REG_IN): NOT_GATE2_.3 SELECTOR_PARAM_.6
CTRL_SIG_21_(PARAM_IN): INSTRUCTION_MEMORY_2.16 SELECTOR_PARAM_.3
CTRL_SIG_22_(P_REG_OUT): NOT_GATE2_.1 SELECTOR_PARAM_.5
CTRL_SIG_22_(PARAM_OUT): INSTRUCTION_MEMORY_2.17 SELECTOR_PARAM_.2
CTRL_SIG_23_(LOOP_CONTROL_B): INSTRUCTION_MEMORY_2.18 SELECTOR_BRANCH_.3
CTRL_SIG_24_(LOOP_CONTROL_A): INSTRUCTION_MEMORY_2.19 SELECTOR_BRANCH_.2
END_CRNT_CMD: AND_GATE3_.9 SELECTOR_LOGIC_.9
END_CRNT_CMD&&BTN_PRESS: AND_GATE3_.8 MICRO_COUNTER_LOWER.1 MICRO_COUNTER_UPPER.1
GND: 4_INP_OR_GATE.7 ADDER_LOWER.8 ADDER_UPPER.8 ADDR_MEM_REG_LOWER.1 ADDR_MEM_REG_LOWER.2 ADDR_MEM_REG_LOWER.8 ADDR_MEM_REG_UPPER.1 ADDR_MEM_REG_UPPER.2 ADDR_MEM_REG_UPPER.8 AND_GATE3_.7 AND_GATE4_.7 AND_GATE_.7 AUTO_CLOCK.1 C1.- C2.- C3.- C4.- CLK_TRIGGER.3 EXTENSION.11 FLAG_REG_LOWER.1 FLAG_REG_LOWER.2 FLAG_REG_LOWER.8 FLAG_REG_UPPER.1 FLAG_REG_UPPER.2 FLAG_REG_UPPER.8 INSTRUC_REGISTER_LOWER.1 INSTRUC_REGISTER_LOWER.2 INSTRUC_REGISTER_LOWER.8 INSTRUC_REGISTER_UPPER.1 INSTRUC_REGISTER_UPPER.2 INSTRUC_REGISTER_UPPER.8 INSTRUCTION_MEMORY_0.14 INSTRUCTION_MEMORY_0.20 INSTRUCTION_MEMORY_0.22 INSTRUCTION_MEMORY_1.14 INSTRUCTION_MEMORY_1.20 INSTRUCTION_MEMORY_1.22 INSTRUCTION_MEMORY_2.14 INSTRUCTION_MEMORY_2.20 INSTRUCTION_MEMORY_2.22 INSTRUCTIONS_EXTENSION.15 KEYBOARD.4 KEYBOARD_ASCII_TABLE.2 KEYBOARD_ASCII_TABLE.14 KEYBOARD_ASCII_TABLE.20 KEYBOARD_ASCII_TABLE.21 KEYBOARD_ASCII_TABLE.22 KEYBOARD_ASCII_TABLE.23 KEYBOARD_ASCII_TABLE.24 KEYBOARD_ASCII_TABLE.25 KEYBOARD_SHIFT_LOWER.8 KEYBOARD_SHIFT_LOWER.13 KEYBOARD_SHIFT_UPPER.8 KEYBOARD_SHIFT_UPPER.13 MEMORY.2 MEMORY.14 MEMORY.20 MEMORY.21 MEMORY.22 MEMORY.23 MEMORY.24 MICRO_COUNTER_LOWER.8 MICRO_COUNTER_UPPER.8 NOR_GATE_.7 NOT_GATE1_.7 NOT_GATE2_.7 NOT_GATE3_.7 NOT_GATE4_.7 NOT_GATE_.7 OR_GATE_.7 OUT_REG_LOWER.1 OUT_REG_LOWER.2 OUT_REG_LOWER.8 OUT_REG_UPPER.1 OUT_REG_UPPER.2 OUT_REG_UPPER.8 OUT_ROM_LOWER.2 OUT_ROM_LOWER.3 OUT_ROM_LOWER.4 OUT_ROM_LOWER.5 OUT_ROM_LOWER.6 OUT_ROM_LOWER.14 OUT_ROM_LOWER.20 OUT_ROM_LOWER.21 OUT_ROM_LOWER.22 OUT_ROM_LOWER.23 OUT_ROM_LOWER.24 OUT_ROM_LOWER.25 OUT_ROM_UPPER.2 OUT_ROM_UPPER.3 OUT_ROM_UPPER.4 OUT_ROM_UPPER.5 OUT_ROM_UPPER.6 OUT_ROM_UPPER.14 OUT_ROM_UPPER.20 OUT_ROM_UPPER.21 OUT_ROM_UPPER.22 OUT_ROM_UPPER.23 OUT_ROM_UPPER.24 OUT_ROM_UPPER.25 OUT_SEGMENT_LOWER.3 OUT_SEGMENT_LOWER.8 OUT_SEGMENT_UPPER.3 OUT_SEGMENT_UPPER.8 OUTPUT_BUFFER_ALU.1 OUTPUT_BUFFER_ALU.10 OUTPUT_BUFFER_CALC_REG.10 OUTPUT_BUFFER_FLAGS.1 OUTPUT_BUFFER_FLAGS.10 OUTPUT_BUFFER_INSTRUCTION.10 OUTPUT_BUFFER_KEYBOARD.1 OUTPUT_BUFFER_KEYBOARD.10 OUTPUT_BUFFER_MEMORY.10 OUTPUT_BUFFER_PARAM_REG.10 OUTPUT_BUFFER_PC.10 OUTPUT_BUFFER_RAM.10 OUTPUT_BUFFER_REG_A.10 PROGRAM_COUNTER_LOWER.8 PROGRAM_COUNTER_UPPER.8 R4.1 R5.1 R8.1 R9.1 R10.1 R11.1 R12.1 R13.1 R14.1 R15.1 R16.2 R17.2 R18.2 R19.2 R20.2 R21.2 R22.2 R23.2 R24.2 R25.2 R26.2 R27.2 R28.2 R29.2 R30.2 R31.2 R32.2 R33.2 R34.2 R35.2 R36.2 R37.2 R38.2 R39.2 R40.1 R41.1 R42.1 R43.1 R44.1 R45.1 R53.2 R54.2 R55.2 R56.2 R57.2 R58.2 R59.2 R60.2 R61.2 R62.2 R63.2 R64.2 R65.2 R66.2 R67.2 R68.2 R69.2 R70.2 R71.2 R72.2 R73.2 R74.2 R75.2 R76.2 R77.1 R78.1 R79.1 R81.2 RAM.1 RAM.2 RAM.14 RAM.20 RAM.21 RAM.23 RAM.24 RAM.25 RAM.26 RAM_ADDR_LOWER.1 RAM_ADDR_LOWER.2 RAM_ADDR_LOWER.8 RAM_ADDR_UPPER.1 RAM_ADDR_UPPER.2 RAM_ADDR_UPPER.8 REG_A_LOWER.1 REG_A_LOWER.2 REG_A_LOWER.8 REG_A_UPPER.1 REG_A_UPPER.2 REG_A_UPPER.8 REG_CALC_LOWER.1 REG_CALC_LOWER.2 REG_CALC_LOWER.8 REG_CALC_UPPER.1 REG_CALC_UPPER.2 REG_CALC_UPPER.8 REG_PARAM_LOWER.1 REG_PARAM_LOWER.2 REG_PARAM_LOWER.8 REG_PARAM_UPPER.1 REG_PARAM_UPPER.2 REG_PARAM_UPPER.8 RESET_PC.4 SELECTOR_BRANCH_.1 SELECTOR_BRANCH_.8 SELECTOR_BRANCH_.15 SELECTOR_INSRUCTION_LOWER.2 SELECTOR_INSRUCTION_LOWER.5 SELECTOR_INSRUCTION_LOWER.8 SELECTOR_INSRUCTION_LOWER.11 SELECTOR_INSRUCTION_LOWER.14 SELECTOR_INSRUCTION_LOWER.15 SELECTOR_INSRUCTION_UPPER.2 SELECTOR_INSRUCTION_UPPER.5 SELECTOR_INSRUCTION_UPPER.8 SELECTOR_INSRUCTION_UPPER.11 SELECTOR_INSRUCTION_UPPER.14 SELECTOR_INSRUCTION_UPPER.15 SELECTOR_LOGIC_.1 SELECTOR_LOGIC_.8 SELECTOR_LOGIC_.15 SELECTOR_PARAM_.1 SELECTOR_PARAM_.8 SELECTOR_PARAM_.15 SELECTOR_STACK_.1 SELECTOR_STACK_.8 SELECTOR_STACK_.15 STEPPER_CLOCK.1 SUBTRACT_INVRTR_LOWER_.7 SUBTRACT_INVRTR_UPPER_.7 X1.1 XOR_GATE_1.7 XOR_GATE_2.7 ZERO_POS_FLAG_IDENTIFIER.7
HLT_SIGNAL: AND_GATE_.9 NOR_GATE_.4
INPUT_CTRL: AND_GATE_.13 SELECTOR_PARAM_.7 XOR_GATE_2.13
INSTRUCTION_A0: INSTRUC_REGISTER_LOWER.6 INSTRUCTION_MEMORY_0.10 INSTRUCTION_MEMORY_1.10 INSTRUCTION_MEMORY_2.10 INSTRUCTIONS_EXTENSION.1
INSTRUCTION_A1: INSTRUC_REGISTER_LOWER.5 INSTRUCTION_MEMORY_0.9 INSTRUCTION_MEMORY_1.9 INSTRUCTION_MEMORY_2.9 INSTRUCTIONS_EXTENSION.2
INSTRUCTION_A2: INSTRUC_REGISTER_LOWER.4 INSTRUCTION_MEMORY_0.8 INSTRUCTION_MEMORY_1.8 INSTRUCTION_MEMORY_2.8 INSTRUCTIONS_EXTENSION.3
INSTRUCTION_A3: INSTRUC_REGISTER_LOWER.3 INSTRUCTION_MEMORY_0.7 INSTRUCTION_MEMORY_1.7 INSTRUCTION_MEMORY_2.7 INSTRUCTIONS_EXTENSION.4
INSTRUCTION_A4: INSTRUC_REGISTER_UPPER.6 INSTRUCTION_MEMORY_0.6 INSTRUCTION_MEMORY_1.6 INSTRUCTION_MEMORY_2.6 INSTRUCTIONS_EXTENSION.5
INSTRUCTION_A5: INSTRUC_REGISTER_UPPER.5 INSTRUCTION_MEMORY_0.5 INSTRUCTION_MEMORY_1.5 INSTRUCTION_MEMORY_2.5 INSTRUCTIONS_EXTENSION.6
INSTRUCTION_A6: INSTRUC_REGISTER_UPPER.4 INSTRUCTION_MEMORY_0.4 INSTRUCTION_MEMORY_1.4 INSTRUCTION_MEMORY_2.4 INSTRUCTIONS_EXTENSION.7
INSTRUCTION_A7: INSTRUC_REGISTER_UPPER.3 INSTRUCTION_MEMORY_0.3 INSTRUCTION_MEMORY_1.3 INSTRUCTION_MEMORY_2.3 INSTRUCTIONS_EXTENSION.8
INSTRUCTION_IN: INSTRUC_REGISTER_LOWER.9 INSTRUC_REGISTER_LOWER.10 INSTRUC_REGISTER_UPPER.9 INSTRUC_REGISTER_UPPER.10 SELECTOR_LOGIC_.5
INSTRUCTION_OUTPUT: OUTPUT_BUFFER_INSTRUCTION.19 SELECTOR_INSRUCTION_LOWER.1 SELECTOR_INSRUCTION_UPPER.1 SELECTOR_LOGIC_.6
INV_FLAG_TOGGLE_IN: FLAG_REG_LOWER.9 FLAG_REG_LOWER.10 FLAG_REG_UPPER.9 FLAG_REG_UPPER.10 NOT_GATE1_.12
INVERTED_CLOCK: INVERTED_CLK_LED.A MICRO_COUNTER_LOWER.2 MICRO_COUNTER_UPPER.2 NOT_GATE1_.10
MEMORY_IN: NOT_GATE1_.5 SELECTOR_PARAM_.10
MEMORY_OUT: NOT_GATE1_.9 SELECTOR_PARAM_.11
MICRO_A8: INSTRUCTION_MEMORY_0.25 INSTRUCTION_MEMORY_1.25 INSTRUCTION_MEMORY_2.25 INSTRUCTIONS_EXTENSION.9 MICRO_COUNTER_LOWER.14 USTEP_1.A
MICRO_A9: INSTRUCTION_MEMORY_0.24 INSTRUCTION_MEMORY_1.24 INSTRUCTION_MEMORY_2.24 INSTRUCTIONS_EXTENSION.10 MICRO_COUNTER_LOWER.13 USTEP_2.A
MICRO_A10: INSTRUCTION_MEMORY_0.21 INSTRUCTION_MEMORY_1.21 INSTRUCTION_MEMORY_2.21 INSTRUCTIONS_EXTENSION.11 MICRO_COUNTER_LOWER.12 USTEP_4.A
MICRO_A11: INSTRUCTION_MEMORY_0.23 INSTRUCTION_MEMORY_1.23 INSTRUCTION_MEMORY_2.23 INSTRUCTIONS_EXTENSION.12 MICRO_COUNTER_LOWER.11 USTEP_3.A
MICRO_A12: INSTRUCTION_MEMORY_0.2 INSTRUCTION_MEMORY_1.2 INSTRUCTION_MEMORY_2.2 INSTRUCTIONS_EXTENSION.13 MICRO_COUNTER_UPPER.14 USTEP_5.A
MODE_SIGNAL: AND_GATE_.4 CLK_MODE.1 NOT_GATE1_.3 R4.2
N$1: C2.+ R3.1 STEPPER_CLOCK.6 STEPPER_CLOCK.7
N$2: CLK_TRIGGER.2 R2.2 STEPPER_CLOCK.2
N$3: CLOCK.K R5.2
N$4: AND_GATE_.5 STEPPER_CLOCK.3
N$5: SELECTOR_INSRUCTION_LOWER.12 SELECTOR_PARAM_.13
N$6: AND_GATE_.1 AUTO_CLOCK.3
N$7: PARAM_LED_3.K R69.1
N$8: NOT_GATE3_.4 OUTPUT_BUFFER_ALU.19
N$9: AND_GATE_.2 NOT_GATE1_.4
N$10: SELECTOR_INSRUCTION_LOWER.9 SELECTOR_PARAM_.14
N$11: AND_GATE_.10 OR_GATE_.3
N$12: PARAM_LED_2.K R70.1
N$13: AND_GATE_.3 OR_GATE_.1
N$14: AND_GATE_.6 OR_GATE_.2
N$15: PARAM_LED_1.K R71.1
N$16: AUTO_CLOCK.2 AUTO_CLOCK.6 C1.+ R7.2
N$17: PARAM_LED_5.K R72.1
N$18: FLAG_6.A FLAG_REG_LOWER.5 OUTPUT_BUFFER_FLAGS.13 XOR_GATE_2.4
N$19: ADDER_LOWER.6 SUBTRACT_INVRTR_LOWER_.11
N$20: ADDER_LOWER.2 SUBTRACT_INVRTR_LOWER_.8
N$21: ADDER_LOWER.15 SUBTRACT_INVRTR_LOWER_.6
N$22: ADDER_LOWER.11 SUBTRACT_INVRTR_LOWER_.3
N$23: ADDER_UPPER.6 SUBTRACT_INVRTR_UPPER_.11
N$24: ADDER_UPPER.2 SUBTRACT_INVRTR_UPPER_.8
N$25: ADDER_UPPER.15 SUBTRACT_INVRTR_UPPER_.6
N$26 [Databus]: KEYBOARD_ASCII_TABLE.17 OUTPUT_BUFFER_KEYBOARD.13
N$27: ADDER_UPPER.11 SUBTRACT_INVRTR_UPPER_.3
N$28: OUTPUT_BUFFER_RAM.3 RAM.12 RAM_LED_2.A
N$29: OUTPUT_BUFFER_RAM.4 RAM.13 RAM_LED_3.A
N$30: OUTPUT_BUFFER_RAM.5 RAM.15 RAM_LED_4.A
N$31: OUTPUT_BUFFER_RAM.6 RAM.16 RAM_LED_5.A
N$32: OUTPUT_BUFFER_RAM.7 RAM.17 RAM_LED_6.A
N$33: OUTPUT_BUFFER_RAM.8 RAM.18 RAM_LED_7.A
N$34: OUTPUT_BUFFER_RAM.9 RAM.19 RAM_LED_8.A
N$35: R33.1 RAM_LED_2.K
N$36: AND_GATE4_.1 NOT_GATE2_.6
N$37: NOT_GATE2_.12 RAM.27
N$38: R34.1 RAM_LED_3.K
N$39: R35.1 RAM_LED_4.K
N$41: FLAG_8.A FLAG_REG_LOWER.3 OUTPUT_BUFFER_FLAGS.11
N$42: FLAG_7.A FLAG_REG_LOWER.4 OUTPUT_BUFFER_FLAGS.12 XOR_GATE_2.9
N$43: SELECTOR_BRANCH_.14 SELECTOR_INSRUCTION_LOWER.4
N$44: FLAG_5.A FLAG_REG_LOWER.6 OUTPUT_BUFFER_FLAGS.14 XOR_GATE_2.1
N$45: AND_GATE3_.12 NOT_GATE2_.8
N$46: R36.1 RAM_LED_5.K
N$47: R37.1 RAM_LED_6.K
N$48: SELECTOR_BRANCH_.13 SELECTOR_INSRUCTION_LOWER.7
N$49: R38.1 RAM_LED_7.K
N$50: R39.1 RAM_LED_8.K
N$51: FREQUENCY.S R7.1
N$52: R32.1 RAM_LED_1.K
N$53: AND_GATE4_.4 NOT_GATE1_.2
N$54: FLAG_2.A FLAG_REG_UPPER.5 OUTPUT_BUFFER_FLAGS.17 XOR_GATE_1.4
N$55: SELECTOR_INSRUCTION_UPPER.9 SELECTOR_STACK_.2
N$57: NOT_GATE4_.4 RAM_ADDR_LOWER.9 RAM_ADDR_LOWER.10 RAM_ADDR_UPPER.9 RAM_ADDR_UPPER.10
N$58: FLAG_REG_LOWER.13 XOR_GATE_2.8
N$59: FLAG_REG_LOWER.12 XOR_GATE_2.6
N$60: FLAG_REG_LOWER.11 XOR_GATE_2.3
N$61: KEYBOARD.2 KEYBOARD_SHIFT_UPPER.14
N$62: MICRO_COUNTER_LOWER.15 MICRO_COUNTER_UPPER.10
N$63: D1.A KEYBOARD_SHIFT_LOWER.11 KEYBOARD_SHIFT_UPPER.11 NOT_GATE3_.2 NOT_GATE3_.5 R6.1
N$64: FLAG_8.K R8.2
N$65: R14.2 ZERO_FLAG.K
N$66: OVERFLOW_FLAG.K R13.2
N$67: POSITIVE_FLAG.K R12.2
N$68: FLAG_5.K R11.2
N$69: FLAG_6.K R10.2
N$70: FLAG_7.K R9.2
N$71: FLAG_3.A FLAG_REG_UPPER.4 OUTPUT_BUFFER_FLAGS.16 XOR_GATE_1.9
N$72: FLAG_1.K R15.2
N$73: OUTPUT_BUFFER_RAM.2 RAM.11 RAM_LED_1.A
N$74: KEYBOARD.3 NOT_GATE3_.1
N$75: KEYBOARD_SHIFT_LOWER.12 KEYBOARD_SHIFT_UPPER.12 NOT_GATE3_.6
N$76: 4_INP_OR_GATE.3 AND_GATE3_.11
N$77: 4_INP_OR_GATE.4 AND_GATE4_.3
N$78: AUTO_CLOCK.7 FREQUENCY.E R1.2
N$79: 4_INP_OR_GATE.5 AND_GATE4_.6
N$80: KEYBOARD_ASCII_TABLE.3 KEYBOARD_SHIFT_UPPER.2
N$81: KEYBOARD_SHIFT_LOWER.14 KEYBOARD_SHIFT_UPPER.9
N$82: KEYBOARD_ASCII_TABLE.4 KEYBOARD_SHIFT_UPPER.3
N$83: NOT_GATE_.2 OUTPUT_BUFFER_FLAGS.19
N$84: KEYBOARD_ASCII_TABLE.5 KEYBOARD_SHIFT_UPPER.4
N$85: KEYBOARD_ASCII_TABLE.6 KEYBOARD_SHIFT_UPPER.5
N$86: KEYBOARD_ASCII_TABLE.7 KEYBOARD_SHIFT_UPPER.6
N$87: RAM.3 RAM_ADDR_UPPER.6
N$88: RAM.10 RAM_ADDR_LOWER.3
N$89: RAM.9 RAM_ADDR_LOWER.4
N$90: RAM.8 RAM_ADDR_LOWER.5
N$91: RAM.7 RAM_ADDR_LOWER.6
N$92: RAM.6 RAM_ADDR_UPPER.3
N$93: RAM.5 RAM_ADDR_UPPER.4
N$94: RAM.4 RAM_ADDR_UPPER.5
N$95: KEYBOARD_ASCII_TABLE.8 KEYBOARD_SHIFT_UPPER.7
N$96: KEYBOARD_ASCII_TABLE.9 KEYBOARD_SHIFT_LOWER.15
N$97: KEYBOARD_ASCII_TABLE.10 KEYBOARD_SHIFT_LOWER.1
N$98: NOT_GATE3_.8 NOT_GATE3_.11
N$99: NOT_GATE3_.9 NOT_GATE_.4
N$100: NOR_GATE_.2 NOT_GATE_.6
N$101 [Databus]: KEYBOARD_ASCII_TABLE.19 OUTPUT_BUFFER_KEYBOARD.11
N$102 [Databus]: KEYBOARD_ASCII_TABLE.16 OUTPUT_BUFFER_KEYBOARD.14
N$103 [Databus]: KEYBOARD_ASCII_TABLE.18 OUTPUT_BUFFER_KEYBOARD.12
N$104 [Databus]: KEYBOARD_ASCII_TABLE.11 OUTPUT_BUFFER_KEYBOARD.18
N$105 [Databus]: KEYBOARD_ASCII_TABLE.13 OUTPUT_BUFFER_KEYBOARD.16
N$106: C4.+ D1.C NOR_GATE_.3 NOT_GATE_.3 R6.2
N$107: 4_INP_OR_GATE.1 AND_GATE3_.1 AND_GATE3_.4
N$108: NOT_GATE3_.10 NOT_GATE3_.13
N$109: NOT_GATE3_.12 NOT_GATE_.5
N$110 [Databus]: KEYBOARD_ASCII_TABLE.12 OUTPUT_BUFFER_KEYBOARD.17
N$111: NOT_GATE2_.4 REG_PARAM_LOWER.9 REG_PARAM_LOWER.10 REG_PARAM_UPPER.9 REG_PARAM_UPPER.10
N$112: NOT_GATE2_.2 OUTPUT_BUFFER_PARAM_REG.19
N$113: AND_GATE_.11 XOR_GATE_2.12
N$114: R40.2 USTEP_1.K
N$115: R41.2 USTEP_2.K
N$116: R42.2 USTEP_3.K
N$117: R43.2 USTEP_4.K
N$118: R44.2 USTEP_5.K
N$119: LED_A_REG_1.K R53.1
N$120: LED_A_REG_2.K R54.1
N$121: LED_A_REG_3.K R55.1
N$122: LED_A_REG_4.K R56.1
N$123: LED_A_REG_5.K R57.1
N$124: LED_A_REG_6.K R58.1
N$125: NOR_GATE_.5 SELECTOR_LOGIC_.7
N$126: AND_GATE_.12 NOR_GATE_.1
N$127: NOR_GATE_.6 XOR_GATE_2.11
N$128 [Databus]: KEYBOARD_ASCII_TABLE.15 OUTPUT_BUFFER_KEYBOARD.15
N$129: OUT_ROM_UPPER.11 OUT_SEGMENT_UPPER.4
N$130: OUT_ROM_UPPER.12 OUT_SEGMENT_UPPER.2
N$131: DATABUS_1.K R24.1
N$132: INVERTED_CLK_LED.K R45.2
N$133: DATABUS_2.K R25.1
N$134: DATABUS_3.K R26.1
N$135: DATABUS_4.K R27.1
N$136: DATABUS_5.K R28.1
N$137: DATABUS_6.K R29.1
N$138: DATABUS_7.K R30.1
N$139: OUT_ROM_UPPER.13 OUT_SEGMENT_UPPER.1
N$140: DATABUS_8.K R31.1
N$141: OUT_REG_UPPER.3 OUT_ROM_UPPER.7
N$142: OUT_REG_UPPER.4 OUT_ROM_UPPER.8
N$143: OUT_REG_UPPER.5 OUT_ROM_UPPER.9
N$144: OUT_REG_UPPER.6 OUT_ROM_UPPER.10
N$145: OUT_REG_LOWER.6 OUT_ROM_LOWER.10
N$146: OUT_REG_LOWER.5 OUT_ROM_LOWER.9
N$147: OUT_REG_LOWER.4 OUT_ROM_LOWER.8
N$148: OUT_REG_LOWER.3 OUT_ROM_LOWER.7
N$149: ADDR_MEM_REG_LOWER.6 MEMORY.10
N$150: ADDR_MEM_REG_LOWER.5 MEMORY.9
N$151: ADDR_MEM_REG_LOWER.4 MEMORY.8
N$152: ADDR_MEM_REG_LOWER.3 MEMORY.7
N$153: ADDR_MEM_REG_UPPER.6 MEMORY.6
N$154: ADDR_MEM_REG_UPPER.5 MEMORY.5
N$155: ADDR_MEM_REG_UPPER.4 MEMORY.4
N$156: ADDR_MEM_REG_UPPER.3 MEMORY.3
N$157: MEMORY.13 OUTPUT_BUFFER_MEMORY.7
N$158: MEMORY.12 OUTPUT_BUFFER_MEMORY.8
N$159: MEMORY.11 OUTPUT_BUFFER_MEMORY.9
N$160: MEMORY.15 OUTPUT_BUFFER_MEMORY.6
N$161: MEMORY.16 OUTPUT_BUFFER_MEMORY.5
N$162: MEMORY.17 OUTPUT_BUFFER_MEMORY.4
N$163: MEMORY.18 OUTPUT_BUFFER_MEMORY.3
N$164: MEMORY.19 OUTPUT_BUFFER_MEMORY.2
N$165: OUT_ROM_LOWER.13 OUT_SEGMENT_LOWER.4
N$166: OUT_ROM_LOWER.12 OUT_SEGMENT_LOWER.2
N$167: OUT_ROM_LOWER.11 OUT_SEGMENT_LOWER.1
N$168: OUT_ROM_LOWER.15 OUT_SEGMENT_LOWER.6
N$169: LED_A_REG_7.K R59.1
N$170: PROGRAM_COUNTER_LOWER.15 PROGRAM_COUNTER_UPPER.10
N$171: OUTPUT_BUFFER_PC.9 PC_1.A PROGRAM_COUNTER_LOWER.14
N$172: OUTPUT_BUFFER_PC.8 PC_2.A PROGRAM_COUNTER_LOWER.13
N$173: OUTPUT_BUFFER_PC.7 PC_3.A PROGRAM_COUNTER_LOWER.12
N$174: OUTPUT_BUFFER_PC.6 PC_4.A PROGRAM_COUNTER_LOWER.11
N$175: OUTPUT_BUFFER_PC.4 PC_6.A PROGRAM_COUNTER_UPPER.13
N$176: LED_A_REG_8.K R60.1
N$177: PC_1.K R16.1
N$178: PC_2.K R17.1
N$179: PC_3.K R18.1
N$180: PC_4.K R19.1
N$181: PC_5.K R20.1
N$182: PC_6.K R21.1
N$183: PC_7.K R22.1
N$184: PC_8.K R23.1
N$185: LED_B_REG_1.K R61.1
N$186: LED_B_REG_2.K R62.1
N$187: LED_B_REG_3.K R63.1
N$188: LED_B_REG_4.K R64.1
N$189: LED_B_REG_5.K R65.1
N$190: OUT_ROM_LOWER.16 OUT_SEGMENT_LOWER.7
N$191: LED_B_REG_6.K R66.1
N$192: OUT_ROM_LOWER.17 OUT_SEGMENT_LOWER.9
N$193: OUT_ROM_LOWER.18 OUT_SEGMENT_LOWER.10
N$194: OUTPUT_BUFFER_PC.3 PC_7.A PROGRAM_COUNTER_UPPER.12
N$195: OUTPUT_BUFFER_PC.5 PC_5.A PROGRAM_COUNTER_UPPER.14
N$196: OUTPUT_BUFFER_PC.2 PC_8.A PROGRAM_COUNTER_UPPER.11
N$197: OUT_ROM_LOWER.19 OUT_SEGMENT_LOWER.5
N$198: OUT_ROM_UPPER.16 OUT_SEGMENT_UPPER.7
N$199: OUT_ROM_UPPER.15 OUT_SEGMENT_UPPER.6
N$200: OUT_ROM_UPPER.19 OUT_SEGMENT_UPPER.9
N$201: OUT_ROM_UPPER.18 OUT_SEGMENT_UPPER.10
N$202: LED_B_REG_7.K R67.1
N$203: LED_B_REG_8.K R68.1
N$204: PARAM_LED_6.K R73.1
N$205: PARAM_LED_7.K R74.1
N$206: PARAM_LED_8.K R75.1
N$207: PARAM_LED_4.K R76.1
N$208: OUT_ROM_UPPER.17 OUT_SEGMENT_UPPER.5
N$209: 4_INP_OR_GATE.2 NOT_GATE4_.2
N$210: OUTPUT_BUFFER_KEYBOARD.19 SELECTOR_PARAM_.9
N$212: SELECTOR_INSRUCTION_UPPER.12 SELECTOR_STACK_.3
N$217: FLAG_4.A FLAG_REG_UPPER.3 OUTPUT_BUFFER_FLAGS.15 XOR_GATE_1.12
N$219: FLAG_REG_UPPER.11 XOR_GATE_1.3
N$220: FLAG_REG_UPPER.12 XOR_GATE_1.6
N$221: FLAG_REG_UPPER.13 XOR_GATE_1.8
N$222: FLAG_REG_UPPER.14 XOR_GATE_1.11
N$223: NOT_GATE4_.10 OUTPUT_BUFFER_RAM.19
N$225: AND_GATE3_.5 NOT_GATE4_.12
N$226: AND_GATE3_.2 NOT_GATE_.8
N$227: FLAG_2.K R77.2
N$228: FLAG_3.K R78.2
N$229: FLAG_4.K R79.2
OF_SELECTED: NOT_GATE2_.9 SELECTOR_BRANCH_.5
OVERFLOW_FLAG: ADDER_UPPER.9 AND_GATE3_.13 FLAG_REG_LOWER.14 OVERFLOW_FLAG.A
PC_INC: NOT_GATE2_.11 SELECTOR_STACK_.7
PC_LOAD: AND_GATE3_.3 NOT_GATE4_.5
PC_LOAD_SIGNAL: NOT_GATE_.9 SELECTOR_STACK_.5
PC_OUT: OUTPUT_BUFFER_PC.19 SELECTOR_STACK_.6
PF_SELECTED: NOT_GATE1_.1 SELECTOR_BRANCH_.7
RAM_ADDR_IN: NOT_GATE4_.3 SELECTOR_INSRUCTION_UPPER.4
RAM_WRITE: NOT_GATE2_.13 RAM.22 SELECTOR_INSRUCTION_UPPER.7
RAW_INP_MODE: OUTPUT_BUFFER_RAM.1 SELECTOR_STACK_.9
REG_A_1PLACE: ADDER_LOWER.5 LED_A_REG_1.A OUTPUT_BUFFER_REG_A.9 REG_A_LOWER.6 ZERO_POS_FLAG_IDENTIFIER.5
REG_A_2PLACE: ADDER_LOWER.3 LED_A_REG_2.A OUTPUT_BUFFER_REG_A.8 REG_A_LOWER.5 ZERO_POS_FLAG_IDENTIFIER.4
REG_A_4PLACE: ADDER_LOWER.14 LED_A_REG_3.A OUTPUT_BUFFER_REG_A.7 REG_A_LOWER.4 ZERO_POS_FLAG_IDENTIFIER.3
REG_A_8PLACE: ADDER_LOWER.12 LED_A_REG_4.A OUTPUT_BUFFER_REG_A.6 REG_A_LOWER.3 ZERO_POS_FLAG_IDENTIFIER.2
REG_A_16PLACE: ADDER_UPPER.5 LED_A_REG_5.A OUTPUT_BUFFER_REG_A.5 REG_A_UPPER.6 ZERO_POS_FLAG_IDENTIFIER.9
REG_A_32PLACE: ADDER_UPPER.3 LED_A_REG_6.A OUTPUT_BUFFER_REG_A.4 REG_A_UPPER.5 ZERO_POS_FLAG_IDENTIFIER.10
REG_A_64PLACE: ADDER_UPPER.14 LED_A_REG_7.A OUTPUT_BUFFER_REG_A.3 REG_A_UPPER.4 ZERO_POS_FLAG_IDENTIFIER.11
REG_A_128PLACE: ADDER_UPPER.12 LED_A_REG_8.A OUTPUT_BUFFER_REG_A.2 REG_A_UPPER.3 ZERO_POS_FLAG_IDENTIFIER.12
REG_A_IN: REG_A_LOWER.9 REG_A_LOWER.10 REG_A_UPPER.9 REG_A_UPPER.10 SELECTOR_BRANCH_.10
REG_A_OUT: OUTPUT_BUFFER_REG_A.19 SELECTOR_BRANCH_.11
REG_B_1PLACE: LED_B_REG_1.A OUTPUT_BUFFER_CALC_REG.9 REG_CALC_LOWER.6 SUBTRACT_INVRTR_LOWER_.13
REG_B_2PLACE: LED_B_REG_2.A OUTPUT_BUFFER_CALC_REG.8 REG_CALC_LOWER.5 SUBTRACT_INVRTR_LOWER_.10
REG_B_4PLACE: LED_B_REG_3.A OUTPUT_BUFFER_CALC_REG.7 REG_CALC_LOWER.4 SUBTRACT_INVRTR_LOWER_.5
REG_B_8PLACE: LED_B_REG_4.A OUTPUT_BUFFER_CALC_REG.6 REG_CALC_LOWER.3 SUBTRACT_INVRTR_LOWER_.2
REG_B_16PLACE: LED_B_REG_5.A OUTPUT_BUFFER_CALC_REG.5 REG_CALC_UPPER.6 SUBTRACT_INVRTR_UPPER_.13
REG_B_32PLACE: LED_B_REG_6.A OUTPUT_BUFFER_CALC_REG.4 REG_CALC_UPPER.5 SUBTRACT_INVRTR_UPPER_.10
REG_B_64PLACE: LED_B_REG_7.A OUTPUT_BUFFER_CALC_REG.3 REG_CALC_UPPER.4 SUBTRACT_INVRTR_UPPER_.5
REG_B_128PLACE: LED_B_REG_8.A OUTPUT_BUFFER_CALC_REG.2 REG_CALC_UPPER.3 SUBTRACT_INVRTR_UPPER_.2
REG_P_1PLACE: OUTPUT_BUFFER_PARAM_REG.9 PARAM_LED_1.A REG_PARAM_LOWER.6
REG_P_2PLACE: OUTPUT_BUFFER_PARAM_REG.8 PARAM_LED_2.A REG_PARAM_LOWER.5
REG_P_4PLACE: OUTPUT_BUFFER_PARAM_REG.7 PARAM_LED_3.A REG_PARAM_LOWER.4
REG_P_8PLACE: OUTPUT_BUFFER_PARAM_REG.6 PARAM_LED_4.A REG_PARAM_LOWER.3
REG_P_16PLACE: OUTPUT_BUFFER_PARAM_REG.5 PARAM_LED_5.A REG_PARAM_UPPER.6
REG_P_32PLACE: OUTPUT_BUFFER_PARAM_REG.4 PARAM_LED_6.A REG_PARAM_UPPER.5
REG_P_64PLACE: OUTPUT_BUFFER_PARAM_REG.3 PARAM_LED_7.A REG_PARAM_UPPER.4
REG_P_128PLACE: OUTPUT_BUFFER_PARAM_REG.2 PARAM_LED_8.A REG_PARAM_UPPER.3
STACK_POP: SELECTOR_STACK_.11
STACK_PUSH: SELECTOR_STACK_.10
SUB_COUNTER_LOAD: AND_GATE3_.6 NOT_GATE4_.9
SUB_LOAD_SIGNAL: NOT_GATE4_.13 SELECTOR_BRANCH_.9
SUM_1: ADDER_LOWER.4 OUTPUT_BUFFER_ALU.18
SUM_2: ADDER_LOWER.1 OUTPUT_BUFFER_ALU.17
SUM_4: ADDER_LOWER.13 OUTPUT_BUFFER_ALU.16
SUM_8: ADDER_LOWER.10 OUTPUT_BUFFER_ALU.15
SUM_16: ADDER_UPPER.4 OUTPUT_BUFFER_ALU.14
SUM_32: ADDER_UPPER.1 OUTPUT_BUFFER_ALU.13
SUM_64: ADDER_UPPER.13 OUTPUT_BUFFER_ALU.12
SUM_128: ADDER_UPPER.10 OUTPUT_BUFFER_ALU.11
SUM_CARRY: ADDER_LOWER.9 ADDER_UPPER.7
UNCONDITIONAL_SELECTED: NOT_GATE4_.1 SELECTOR_BRANCH_.4
VCC: 4_INP_OR_GATE.14 ADDER_LOWER.16 ADDER_UPPER.16 ADDR_MEM_REG_LOWER.16 ADDR_MEM_REG_UPPER.16 AND_GATE3_.14 AND_GATE4_.14 AND_GATE_.14 AUTO_CLOCK.4 AUTO_CLOCK.8 C3.+ CLK_MODE.2 EXTENSION.10 FLAG_REG_LOWER.16 FLAG_REG_UPPER.16 INSTRUC_REGISTER_LOWER.16 INSTRUC_REGISTER_UPPER.16 INSTRUCTION_MEMORY_0.27 INSTRUCTION_MEMORY_0.28 INSTRUCTION_MEMORY_1.27 INSTRUCTION_MEMORY_1.28 INSTRUCTION_MEMORY_2.27 INSTRUCTION_MEMORY_2.28 INSTRUCTIONS_EXTENSION.14 KEYBOARD.1 KEYBOARD_ASCII_TABLE.27 KEYBOARD_ASCII_TABLE.28 KEYBOARD_SHIFT_LOWER.10 KEYBOARD_SHIFT_LOWER.16 KEYBOARD_SHIFT_UPPER.10 KEYBOARD_SHIFT_UPPER.16 MEMORY.27 MEMORY.28 MICRO_COUNTER_LOWER.7 MICRO_COUNTER_LOWER.10 MICRO_COUNTER_LOWER.16 MICRO_COUNTER_UPPER.7 MICRO_COUNTER_UPPER.16 NOR_GATE_.14 NOT_GATE1_.14 NOT_GATE2_.14 NOT_GATE3_.14 NOT_GATE4_.14 NOT_GATE_.14 OR_GATE_.14 OUT_REG_LOWER.16 OUT_REG_UPPER.16 OUT_ROM_LOWER.27 OUT_ROM_LOWER.28 OUT_ROM_UPPER.27 OUT_ROM_UPPER.28 OUTPUT_BUFFER_ALU.20 OUTPUT_BUFFER_CALC_REG.1 OUTPUT_BUFFER_CALC_REG.20 OUTPUT_BUFFER_FLAGS.20 OUTPUT_BUFFER_INSTRUCTION.1 OUTPUT_BUFFER_INSTRUCTION.20 OUTPUT_BUFFER_KEYBOARD.20 OUTPUT_BUFFER_MEMORY.1 OUTPUT_BUFFER_MEMORY.20 OUTPUT_BUFFER_PARAM_REG.1 OUTPUT_BUFFER_PARAM_REG.20 OUTPUT_BUFFER_PC.1 OUTPUT_BUFFER_PC.20 OUTPUT_BUFFER_RAM.20 OUTPUT_BUFFER_REG_A.1 OUTPUT_BUFFER_REG_A.20 PROGRAM_COUNTER_LOWER.7 PROGRAM_COUNTER_LOWER.16 PROGRAM_COUNTER_UPPER.7 PROGRAM_COUNTER_UPPER.16 R1.1 R2.1 R3.2 R80.2 RAM.28 RAM_ADDR_LOWER.16 RAM_ADDR_UPPER.16 REG_A_LOWER.16 REG_A_UPPER.16 REG_CALC_LOWER.16 REG_CALC_UPPER.16 REG_PARAM_LOWER.16 REG_PARAM_UPPER.16 RESET_REGS.1 SELECTOR_BRANCH_.16 SELECTOR_INSRUCTION_LOWER.16 SELECTOR_INSRUCTION_UPPER.16 SELECTOR_LOGIC_.16 SELECTOR_PARAM_.16 SELECTOR_STACK_.16 STEPPER_CLOCK.8 SUBTRACT_INVRTR_LOWER_.14 SUBTRACT_INVRTR_UPPER_.14 X1.2 XOR_GATE_1.14 XOR_GATE_2.14 ZERO_POS_FLAG_IDENTIFIER.14
VDD: IC1.16
VSS: IC1.8
ZERO_FLAG: AND_GATE4_.2 ZERO_FLAG.A ZERO_POS_FLAG_IDENTIFIER.13
ZF_SELECTED: NOT_GATE2_.5 SELECTOR_BRANCH_.6
~DATA/PARAM: FLAG_1.A FLAG_REG_UPPER.6 MEMORY.25 OUTPUT_BUFFER_FLAGS.18 XOR_GATE_1.1
~MEMORY_IN: ADDR_MEM_REG_LOWER.9 ADDR_MEM_REG_LOWER.10 ADDR_MEM_REG_UPPER.9 ADDR_MEM_REG_UPPER.10 NOT_GATE1_.6
~MEMORY_OUT: NOT_GATE1_.8 OUTPUT_BUFFER_MEMORY.19
~PC_INC: NOT_GATE2_.10 PROGRAM_COUNTER_LOWER.10
~PC_LOAD: NOT_GATE4_.6 PROGRAM_COUNTER_LOWER.9 PROGRAM_COUNTER_UPPER.9
~SUB_COUNTER_LOAD: MICRO_COUNTER_LOWER.9 MICRO_COUNTER_UPPER.9 NOT_GATE4_.8